# EAGLE board electron_v020 (EAGLE 6.4)
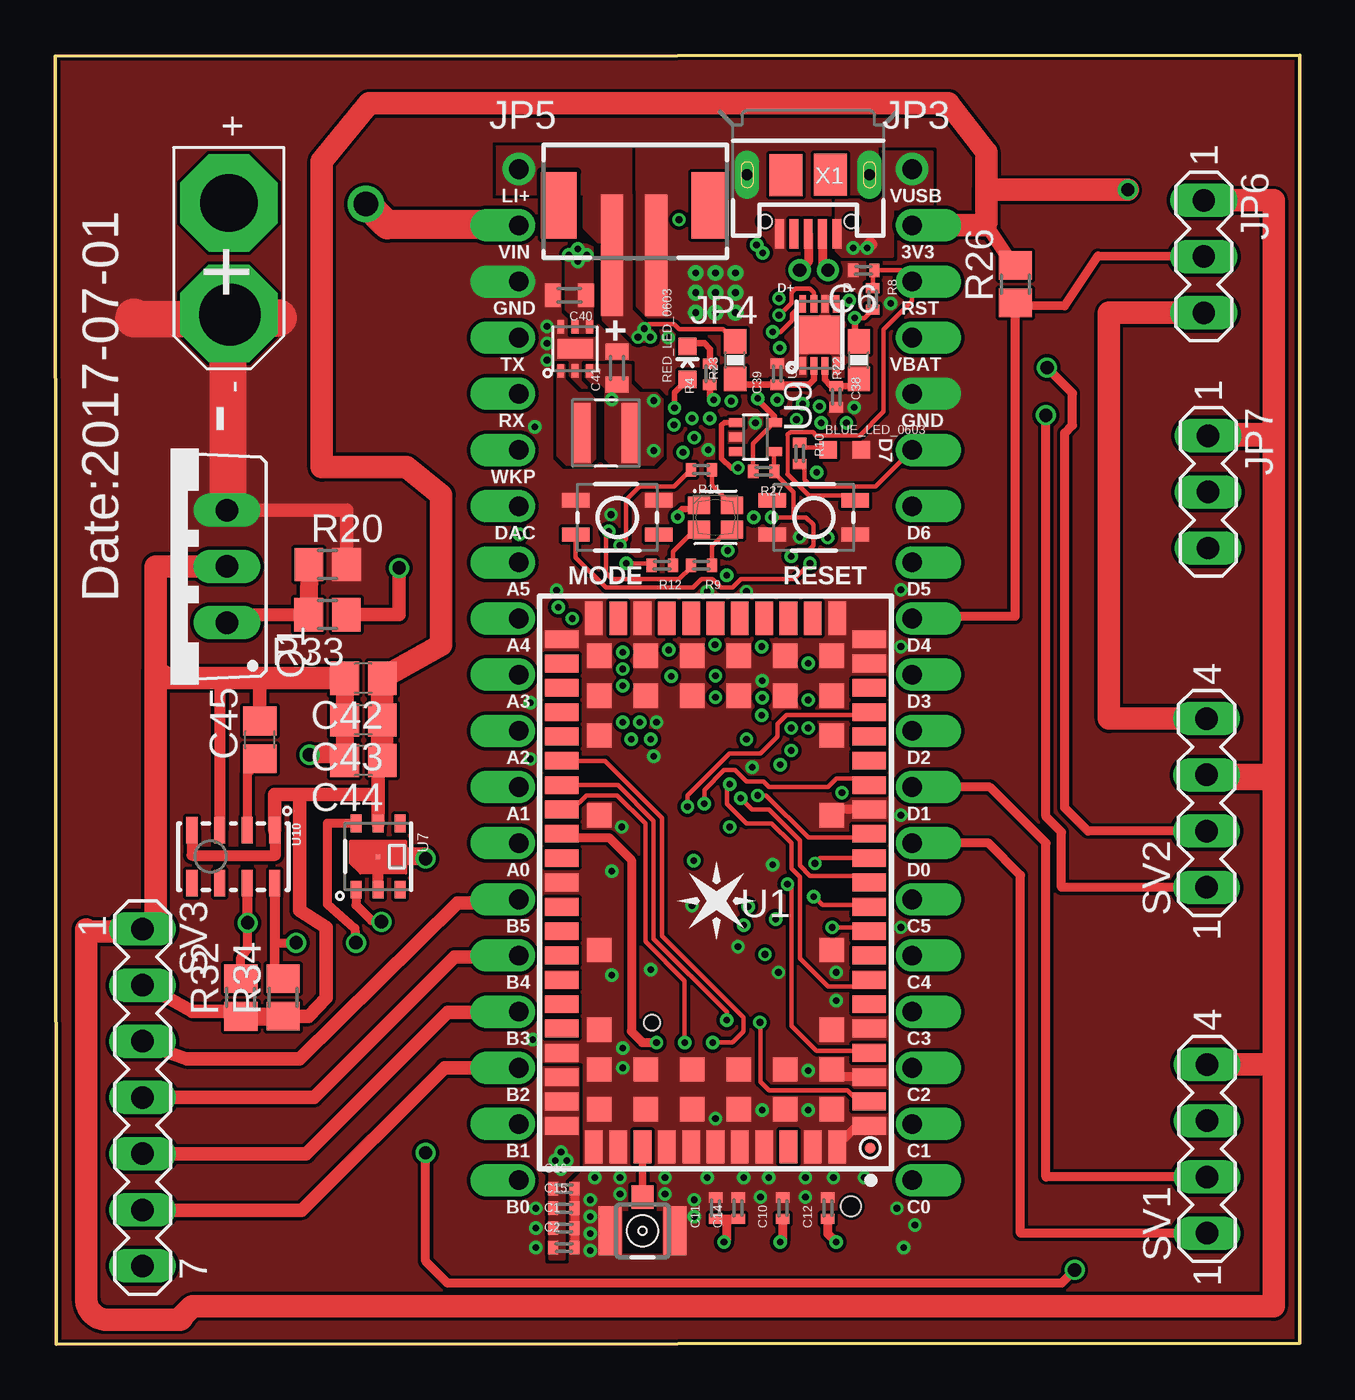
[diagram p0: board, top side]
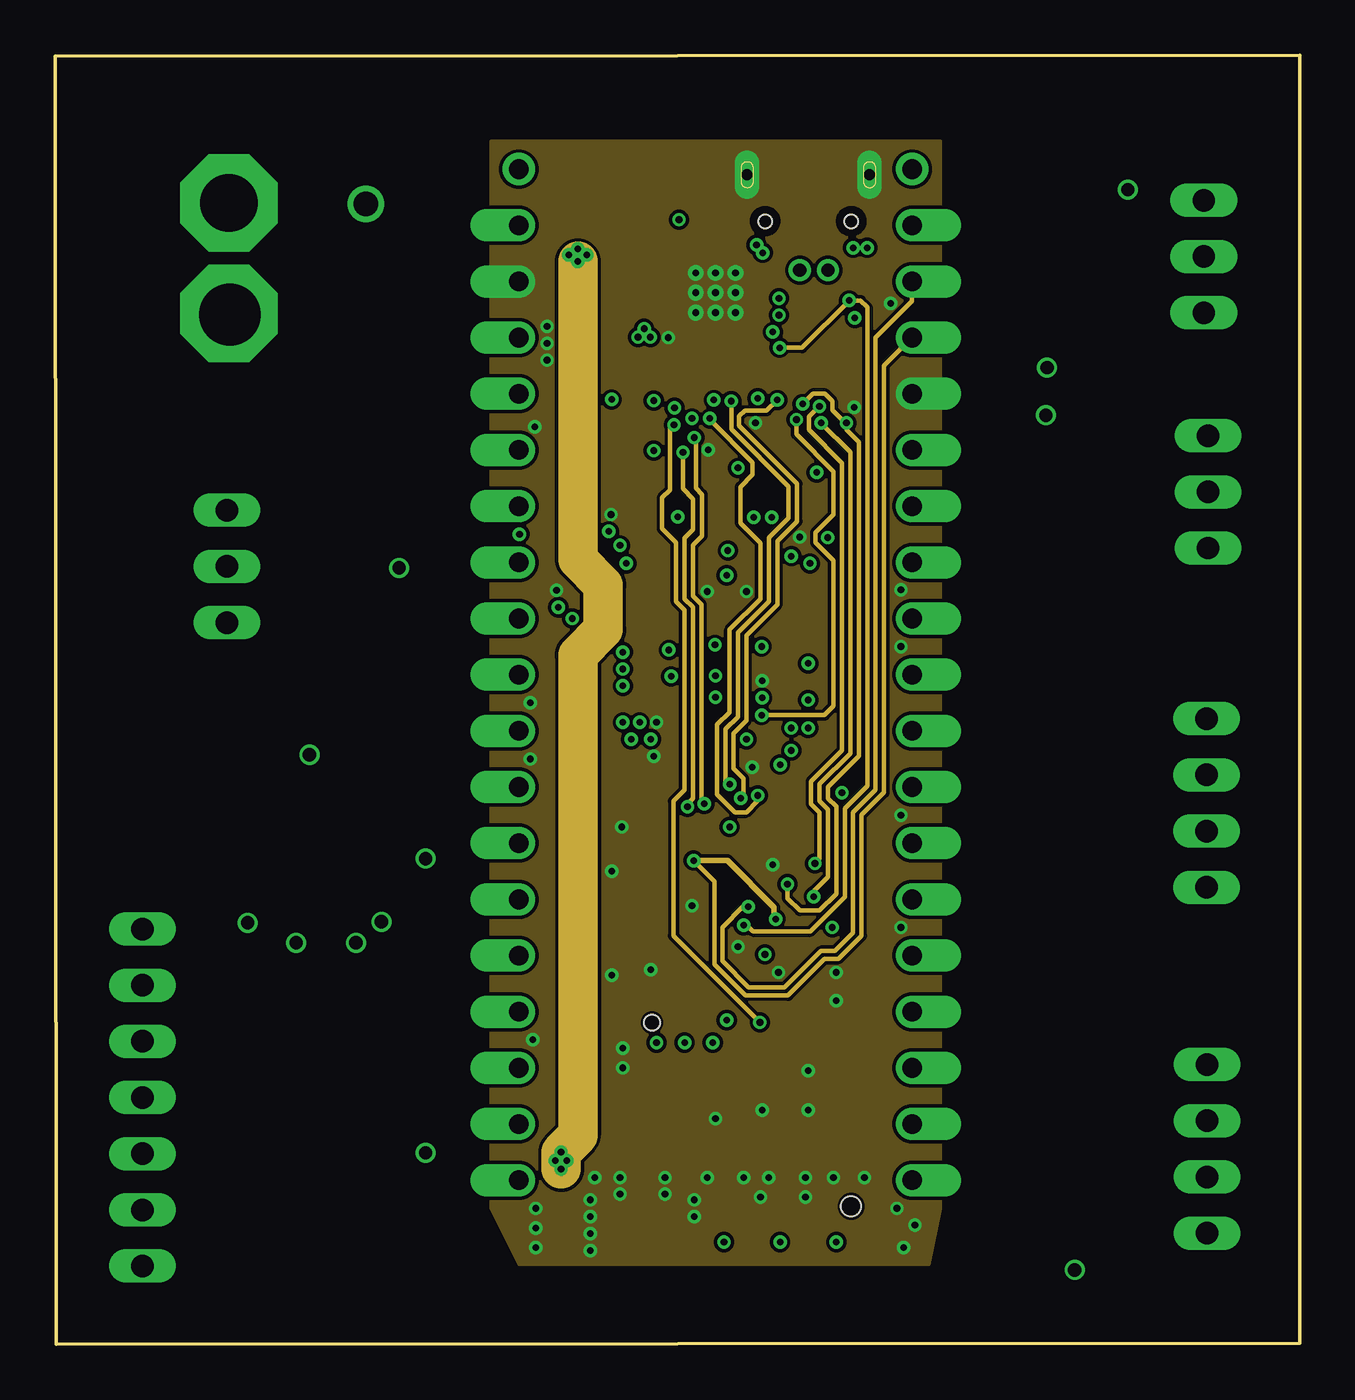
[diagram p1: board, inner layer $GND]
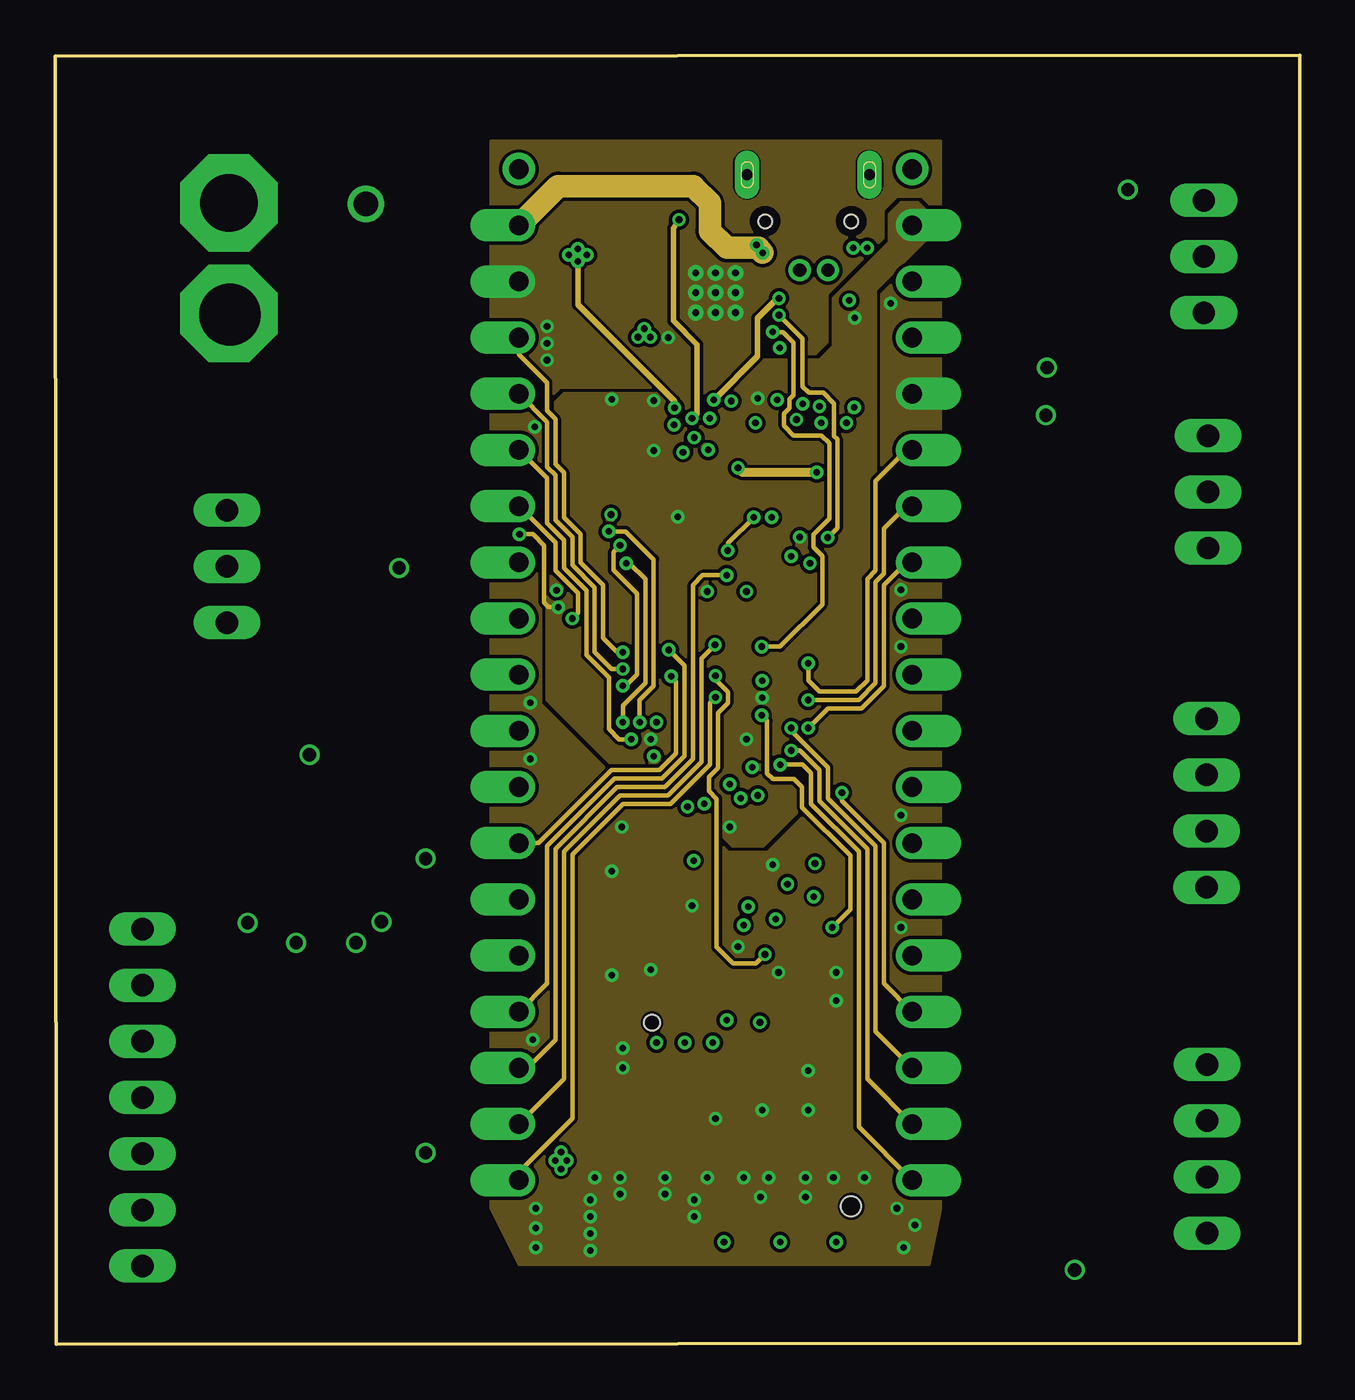
[diagram p2: board, inner layer $+3V3]
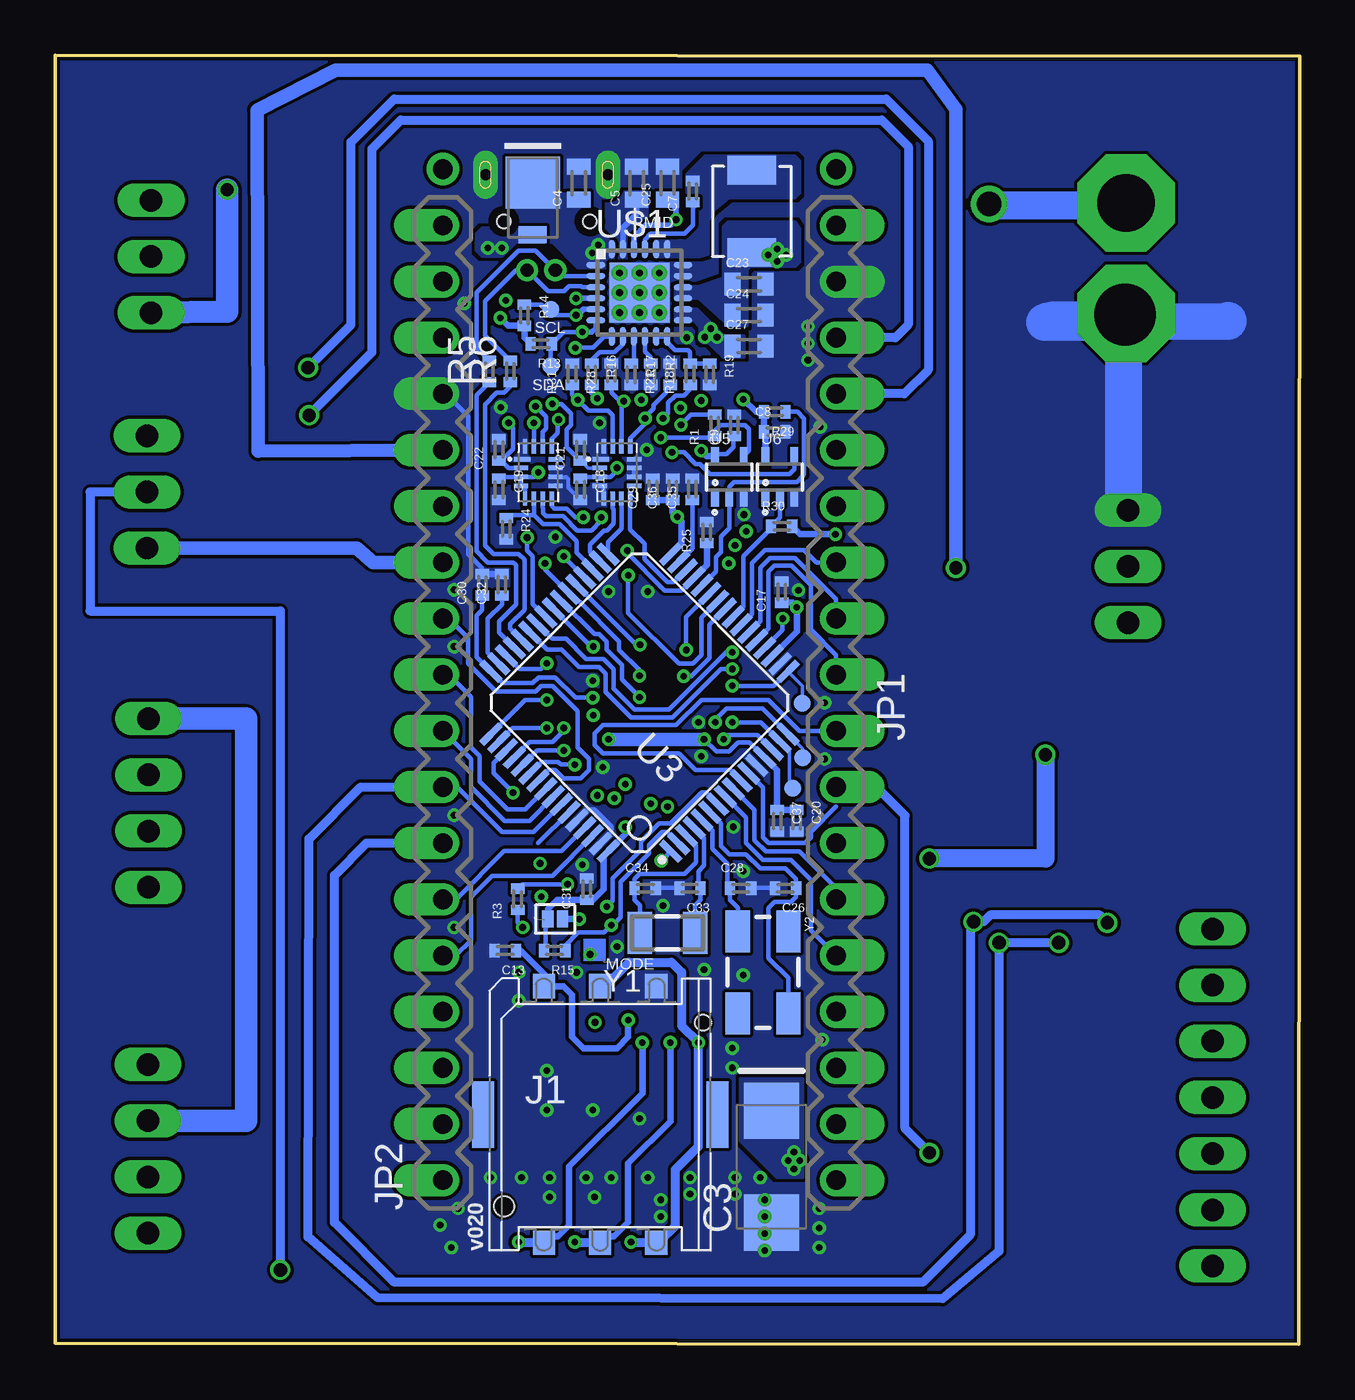
[diagram p3: board, bottom side, seen from below]

Size 56.27 x 58.28 mm. Coordinates in mm from the lower left corner, seen from the top.
Outline: 0,58.23 0.05,0 56.27,0.05 56.27,58.28 0,58.23
Copper layers (1+2*15+16): Top 0.018mm / dielectric 0.195mm / $GND 0.035mm / dielectric 1.1mm / $+3V3 0.035mm / dielectric 0.195mm / Bottom 0.018mm
Design rules "particle-4layer": minimum track width 6mil, minimum drill 0.3mm, track to track 6mil, track to pad 6mil, pad to pad 6mil, via to via 6mil, smd to smd 6mil, copper to edge 6mil, drill to drill 6mil, minimum pad ring 8mil, minimum via ring 6mil, stop-mask expansion 4mil, vias tented up to drill 20mil, thermal gap 8mil
Net classes: 2 RF: width 0.33 mm, clearance 0.191 mm; 3 BAT: clearance 0.203 mm

## Footprints (pad centres in the part's own frame; a part is rotated, then mirrored left to right if it is on the bottom)
LED-0603-NS = smd 0.8 x 0.8: A -0.75,0; C 0.75,0
C0402_B = smd 0.457 x 0.61: 1 -0.483,0; 2 0.483,0
C/6032-28R = smd 2.55 x 2.5: + 2.525,0; - -2.525,0
C0603_B = smd 0.711 x 1.041: 1 -0.749,0; 2 0.749,0
C0805 = smd 1.3 x 1.5: 1 -0.85,0; 2 0.85,0
HSPALM_XT30 = drill 2.6 pad 4.4 octagon: + -2.5,0; - 2.5,0
GCT-SIM8100 = smd 1 x 1.1: C1 2.54,-5.8; C2 0,-5.8; C3 -2.54,-5.8; C5 2.54,5.8; C6 0,5.8; C7 -2.54,5.8 | smd 1 x 3: NC@1 -5.3,0; NC@2 5.3,0 | hole 0.7: 4.65,4.15 | hole 0.9: -4.35,-4.15
IPEX-20279-001E = smd 1 x 1.05: 1 0,1.528 | smd 1.05 x 2.2: 2@1 -1.475,0; 2@2 1.475,0
JUMPER_SMD_NC = smd 0.508 x 0.762: 1 -0.33,0; 2 0.33,0
1X18-D-PADS = drill 0.889 pad 1.473 offset: 1 -21.59,0; 2 -19.05,0; 3 -16.51,0; 4 -13.97,0; 5 -11.43,0; 6 -8.89,0; 7 -6.35,0; 8 -3.81,0; 9 -1.27,0; 10 1.27,0; 11 3.81,0; 12 6.35,0; 13 8.89,0; 14 11.43,0; 15 13.97,0; 16 16.51,0; 17 19.05,0; 18 21.59,0
1X01_NO_SILK = drill 0.889 pad 1.473: 1 0,0
JST-2-SMD-VERT = smd 1 x 5.5: GND 1,-2; VCC -1,-2 | smd 1.6 x 3: P$1 -3.4,0.27; P$2 3.4,0.27
MA03-1 = drill 1.016 long: 1 -2.54,0; 2 0,0; 3 2.54,0
PLCC4-2MM-RGB = smd 1 x 0.8: BLUE -0.75,-0.55; CA 0.75,-0.55; GREEN -0.75,0.55; RED 0.75,0.55
TO220BV = drill 1.016 long: D 0,-2.54; G -2.54,-2.54; S 2.54,-2.54
R0402_B = smd 0.457 x 0.61: 1 -0.483,0; 2 0.483,0
R0805 = smd 1.3 x 1.5: 1 -0.85,0; 2 0.85,0
0603-RES = smd 1.1 x 1: 1 -0.85,0; 2 0.85,0
LED-0603 = smd 0.8 x 0.8: A 0,-0.75; C 0,0.75
TACTILE_SWITCH_SMD = smd 1.25 x 0.65: 1 -1.875,0.775; 2 1.875,0.775; 3 -1.875,-0.775; 4 1.875,-0.775
MA04-1 = drill 1.016 long: 1 -3.81,0; 2 -1.27,0; 3 1.27,0; 4 3.81,0
MA07-1 = drill 1.016 long: 1 -7.62,0; 2 -5.08,0; 3 -2.54,0; 4 0,0; 5 2.54,0; 6 5.08,0; 7 7.62,0
U-BLOX-SARA-U2 = smd 1.5 x 0.8: 1 -6.95,11; 2 -6.95,9.9; 3 -6.95,8.8; 4 -6.95,7.7; 5 -6.95,6.6; 6 -6.95,5.5; 7 -6.95,4.4; 8 -6.95,3.3; 9 -6.95,2.2; 10 -6.95,1.1; 11 -6.95,0; 12 -6.95,-1.1; 13 -6.95,-2.2; 14 -6.95,-3.3; 15 -6.95,-4.4; 16 -6.95,-5.5; 17 -6.95,-6.6; 18 -6.95,-7.7; 19 -6.95,-8.8; 20 -6.95,-9.9; 21 -6.95,-11; 33 6.95,-11; 34 6.95,-9.9; 35 6.95,-8.8; 36 6.95,-7.7; 37 6.95,-6.6; 38 6.95,-5.5; 39 6.95,-4.4; 40 6.95,-3.3; 41 6.95,-2.2; 42 6.95,-1.1; 43 6.95,0; 44 6.95,1.1; 45 6.95,2.2; 46 6.95,3.3; 47 6.95,4.4; 48 6.95,5.5; 49 6.95,6.6; 50 6.95,7.7; 51 6.95,8.8; 52 6.95,9.9; 53 6.95,11 | smd 0.8 x 1.5: 22 -5.5,-11.95; 23 -4.4,-11.95; 24 -3.3,-11.95; 25 -2.2,-11.95; 26 -1.1,-11.95; 27 0,-11.95; 28 1.1,-11.95; 29 2.2,-11.95; 30 3.3,-11.95; 31 4.4,-11.95; 32 5.5,-11.95; 54 5.5,11.95; 55 4.4,11.95; 56 3.3,11.95; 57 2.2,11.95; 58 1.1,11.95; 59 0,11.95; 60 -1.1,11.95; 61 -2.2,11.95; 62 -3.3,11.95; 63 -4.4,11.95; 64 -5.5,11.95 | smd 1.1 x 1.1: 65 -5.25,10.25; 66 -3.15,10.25; 67 -1.05,10.25; 68 1.05,10.25; 69 3.15,10.25; 70 5.25,10.25; 71 -5.25,8.45; 72 -3.15,8.45; 73 -1.05,8.45; 74 1.05,8.45; 75 3.15,8.45; 76 5.25,8.45; 77 -5.25,6.65; 78 5.25,6.65; 79 -5.25,3.05; 80 5.25,3.05; 81 -5.25,-3.05; 82 5.25,-3.05; 83 -5.25,-6.65; 84 5.25,-6.65; 85 -5.25,-8.45; 86 -3.15,-8.45; 87 -1.05,-8.45; 88 1.05,-8.45; 89 3.15,-8.45; 90 5.25,-8.45; 91 -5.25,-10.25; 92 -3.15,-10.25; 93 -1.05,-10.25; 94 1.05,-10.25; 95 3.15,-10.25; 96 5.25,-10.25 | smd 0.5 x 0.5: FID_PIN1 -7,12
UFQFN-16 = smd 0.2 x 0.75: 1 -0.6,-0.73 | smd 0.2 x 0.65: 2 -0.2,-0.78; 3 0.2,-0.78; 4 0.6,-0.78; 9 0.6,0.78; 10 0.2,0.78; 11 -0.2,0.78; 12 -0.6,0.78 | smd 0.65 x 0.2: 5 1.18,-0.6; 6 1.18,-0.2; 7 1.18,0.2; 8 1.18,0.6; 13 -1.18,0.6; 14 -1.18,0.2; 15 -1.18,-0.2; 16 -1.18,-0.6
LQFP64 = smd 1.2 x 0.3: 1 -5.75,3.75; 2 -5.75,3.25; 3 -5.75,2.75; 4 -5.75,2.25; 5 -5.75,1.75; 6 -5.75,1.25; 7 -5.75,0.75; 8 -5.75,0.25; 9 -5.75,-0.25; 10 -5.75,-0.75; 11 -5.75,-1.25; 12 -5.75,-1.75; 13 -5.75,-2.25; 14 -5.75,-2.75; 15 -5.75,-3.25; 16 -5.75,-3.75; 33 5.75,-3.75; 34 5.75,-3.25; 35 5.75,-2.75; 36 5.75,-2.25; 37 5.75,-1.75; 38 5.75,-1.25; 39 5.75,-0.75; 40 5.75,-0.25; 41 5.75,0.25; 42 5.75,0.75; 43 5.75,1.25; 44 5.75,1.75; 45 5.75,2.25; 46 5.75,2.75; 47 5.75,3.25; 48 5.75,3.75 | smd 0.3 x 1.2: 17 -3.75,-5.75; 18 -3.25,-5.75; 19 -2.75,-5.75; 20 -2.25,-5.75; 21 -1.75,-5.75; 22 -1.25,-5.75; 23 -0.75,-5.75; 24 -0.25,-5.75; 25 0.25,-5.75; 26 0.75,-5.75; 27 1.25,-5.75; 28 1.75,-5.75; 29 2.25,-5.75; 30 2.75,-5.75; 31 3.25,-5.75; 32 3.75,-5.75; 49 3.75,5.75; 50 3.25,5.75; 51 2.75,5.75; 52 2.25,5.75; 53 1.75,5.75; 54 1.25,5.75; 55 0.75,5.75; 56 0.25,5.75; 57 -0.25,5.75; 58 -0.75,5.75; 59 -1.25,5.75; 60 -1.75,5.75; 61 -2.25,5.75; 62 -2.75,5.75; 63 -3.25,5.75; 64 -3.75,5.75
TDFN-8 = smd 0.8 x 0.3: 1 -1.4,0.75; 2 -1.4,0.25; 3 -1.4,-0.25; 4 -1.4,-0.75; 5 1.4,-0.75; 6 1.4,-0.25; 7 1.4,0.25; 8 1.4,0.75 | smd 1.73 x 1.88: EP 0,0
SC-70-5 = smd 0.35 x 0.8: 1 -0.65,-0.95; 2 0,-0.95; 3 0.65,-0.95; 4 0.65,0.95; 5 -0.65,0.95
SPARKFUN-SENSORS_HTU21D = smd 0.2 x 0.2: 7 0,0 | smd 0.8 x 0.5: DATA 1.5,-1; GND 1.5,0; NC@1 -1.5,1; NC@6 1.5,1; SCK -1.5,-1; VDD -1.5,0
SC70-5 = smd 0.4 x 0.7: 1 -0.65,-0.85; 2 0,-0.85; 3 0.65,-0.85; 4 0.65,0.85; 5 -0.65,0.85
SPARKFUN-SENSORS_LGA8 = smd 1.2 x 0.5: 1 -1.2,1.875; 2 -1.2,0.625; 3 -1.2,-0.625; 4 -1.2,-1.875; 5 1.2,-1.875; 6 1.2,-0.625; 7 1.2,0.625; 8 1.2,1.875
QFN24 = smd 0.85 x 0.28: 1 -1.975,1.25; 2 -1.975,0.75; 3 -1.975,0.25; 4 -1.975,-0.25; 5 -1.975,-0.75; 6 -1.975,-1.25; 13 1.975,-1.25; 14 1.975,-0.75; 15 1.975,-0.25; 16 1.975,0.25; 17 1.975,0.75; 18 1.975,1.25 | smd 0.28 x 0.85: 7 -1.25,-1.975; 8 -0.75,-1.975; 9 -0.25,-1.975; 10 0.25,-1.975; 11 0.75,-1.975; 12 1.25,-1.975; 19 1.25,1.975; 20 0.75,1.975; 21 0.25,1.975; 22 -0.25,1.975; 23 -0.75,1.975; 24 -1.25,1.975 | smd 2.7 x 2.7: PAD 0,0 | drill 0.3 pad 0.406: PAD@1 -0.9,0.9; PAD@2 0,0.9; PAD@3 0.9,0.9; PAD@4 -0.9,0; PAD@5 0,0; PAD@6 0.9,0; PAD@7 -0.9,-0.9; PAD@8 0,-0.9; PAD@9 0.9,-0.9
DIODE-DO-220AA_NT(SMP) = smd 0.762 x 1.27: ANODE 2.349,0 | smd 2.337 x 2.464: CATHODE 0,0
4020TYPE_NT = smd 1.295 x 2.184: P$1 -1.854,0; P$2 1.854,0
S-PWSON-N6 = smd 0.3 x 0.6: P$1 -0.65,-1; P$2 0,-1; P$3 0.65,-1; P$4 0.65,1; P$5 0,1; P$6 -0.65,1 | smd 1.6 x 0.9: TP 0,0
INDUCTOR-NR3015 = smd 0.8 x 2.7: 1 -1.1,0; 2 1.1,0
M02_0.05_HEADER = drill 0.6 pad 1: P$1 -0.635,0; P$2 0.635,0
TP30_BOT = smd 0.762 x 0.762 bottom: P$1 0,0
USB-MICROB-SLOT-HOLE = smd 0.4 x 1.35: D+ 0,2.675; D- -0.65,2.675; GND 1.3,2.675; ID 0.65,2.675; VBUS -1.3,2.675 | drill 0.5 pad 1.1 long: MT1 -2.775,0; MT2 2.775,0 | smd 1.5 x 1.9: P$1 -1,0; P$2 1,0.01 | hole 0.6: -1.95,2.1; 1.95,2.1
FC135 = smd 1.1 x 1.9: X1 -1.25,0; X2 1.25,0
CRYSTAL-SMD-5X3 = smd 1.9 x 1.1: 1 -1.85,-1.15; 2 1.85,-1.15; 3 1.85,1.15; 4 -1.85,1.15

## Placement (x,y rotation side)
BLUE_LED_0603  [LED-0603-NS]  35.7,40.44 0 top
C1  10nF  [C0402_B]  23,5.26 0 top
C2  0.1uF  [C0402_B]  23,4.37 0 top
C3  220uF  [C/6032-28R]  23.89,8.03 90 bottom
C4  1uF  [C0603_B]  32.6,52.5 90 bottom
C5  20uF  [C0603_B]  29.98,52.5 90 bottom
C6  0.1uF  [C0402_B]  36.56,48.56 180 top
C7  47nF  [C0402_B]  27.44,52.12 90 bottom
C8  0.1uF  [C0402_B]  23.73,41.25 0 bottom
C9  0.1uF  [C0402_B]  25.56,41.55 90 bottom
C10  47pF  [C0402_B]  32.9,6.15 90 top
C11  47pF  [C0402_B]  29.86,6.15 90 top
C12  47pF  [C0402_B]  34.94,6.15 90 top
C13  47pF  [C0402_B]  35.93,17.8 180 bottom
C14  0.1uF  [C0402_B]  30.87,6.15 90 top
C15  68pF  [C0402_B]  23,6.15 0 top
C16  15pF  [C0402_B]  23,7.04 0 top
C17  0.1uF  [C0402_B]  23.43,34.01 90 bottom
C18  0.1uF  [C0402_B]  32.52,38.66 270 bottom
C19  0.1uF  [C0402_B]  36.21,38.66 270 bottom
C20  0.1uF  [C0402_B]  22.74,23.67 270 bottom
C21  0.1uF  [C0402_B]  32.52,40.44 90 bottom
C22  0.1uF  [C0402_B]  36.21,40.44 90 bottom
C23  10uF  [C0603_B]  24.9,47.93 0 bottom
C24  10uF  [C0603_B]  24.9,46.53 0 bottom
C25  4.7uF  [C0603_B]  28.59,52.5 90 bottom
C26  20pF  [C0402_B]  23.25,20.62 180 bottom
C27  10uF  [C0603_B]  24.9,45.14 0 bottom
C28  20pF  [C0402_B]  25.28,20.62 0 bottom
C29  0.1uF  [C0402_B]  29.25,38.66 90 bottom
C30  0.1uF  [C0402_B]  36.97,34.34 90 bottom
C31  0.1uF  [C0402_B]  32.24,20.57 90 bottom
C32  2.2uF  [C0402_B]  36.08,34.34 90 bottom
C33  12pF  [C0402_B]  27.57,20.62 180 bottom
C34  12pF  [C0402_B]  29.6,20.62 0 bottom
C35  2.2uF  [C0402_B]  27.47,38.66 90 bottom
C36  4.7uF  [C0402_B]  28.36,38.66 90 bottom
C37  1uF  [C0402_B]  23.63,23.67 270 bottom
C38  10nF  [C0402_B]  35.32,42.85 270 top
C39  1uF  [C0402_B]  32.65,43.87 90 top
C40  10uF  [C0603_B]  23.25,47.43 180 top
C41  10uF  [C0603_B]  25.41,44.14 90 top
C42  10uF  [C0805]  13.94,30.11 180 top
C43  10uF  [C0805]  13.94,28.23 180 top
C44  10uF  [C0805]  13.94,26.4 180 top
C45  10uF  [C0805]  9.25,27.33 90 top
E$1  [HSPALM_XT30]  7.85,49.11 270 top
J1  SIM-NANO-4FF  [GCT-SIM8100]  31.63,10.39 0 bottom
J2  IPEX-20279-001E  [IPEX-20279-001E]  26.55,5.13 0 top
J3  JUMPER_NC_SMD  [JUMPER_SMD_NC]  33.67,19.23 0 bottom
JP1  M18DPAD  [1X18-D-PADS]  20.97,29.01 270 bottom
JP2  M18DPAD  [1X18-D-PADS]  38.75,29.01 90 bottom
JP3  [1X01_NO_SILK]  38.75,53.14 0 top
JP4  [JST-2-SMD-VERT]  26.17,51.23 0 top
JP5  [1X01_NO_SILK]  20.97,53.14 0 top
JP6  [MA03-1]  51.94,49.18 270 top
JP7  [MA03-1]  52.13,38.54 270 top
LED2  RGB-LED-CLMVB-FKARGB  [PLCC4-2MM-RGB]  29.86,37.39 180 top
Q1  IRF512  [TO220BV]  5.22,35.17 90 top
R1  100k  [R0402_B]  26.45,41.55 90 bottom
R2  333R  [R0402_B]  29.35,43.87 270 bottom
R3  10K  [R0402_B]  35.37,20.12 90 bottom
R4  2.2K  [R0402_B]  29.6,43.87 90 top
R5  22  [R0402_B]  36.64,43.99 90 bottom
R6  22  [R0402_B]  35.7,43.99 90 bottom
R8  10K  [R0402_B]  36.97,47.27 270 top
R9  1K  [R0402_B]  29.22,35.23 180 top
R10  1K  [R0402_B]  33.67,40.28 270 top
R11  1K  [R0402_B]  29.22,39.55 180 top
R12  1K  [R0402_B]  27.44,35.23 180 top
R13  4K7  [R0402_B]  34.3,45.24 180 bottom
R14  4K7  [R0402_B]  35.06,46.53 270 bottom
R15  10K  [R0402_B]  33.69,17.8 180 bottom
R16  10K  [R0402_B]  32.02,43.87 270 bottom
R17  10K  [R0402_B]  30.24,43.87 270 bottom
R18  5.52K  [R0402_B]  27.57,43.87 90 bottom
R19  10K  [R0402_B]  26.68,43.87 270 bottom
R20  10K  [R0805]  12.32,35.26 0 top
R21  10K  [R0402_B]  28.46,43.87 90 bottom
R22  150  [0603-RES]  36.33,44.5 90 top
R23  1K  [0603-RES]  30.75,44.5 90 top
R24  10K  [R0402_B]  35.88,36.88 270 bottom
R25  10K  [R0402_B]  26.81,36.7 90 bottom
R26  4.7K  [R0805]  43.42,47.94 90 top
R27  10K  [R0402_B]  32.04,39.47 180 top
R28  10K  [R0402_B]  31.13,43.87 90 bottom
R29  10K  [R0402_B]  23.73,42.16 180 bottom
R30  10K  [R0402_B]  23.43,36.98 0 bottom
R31  10K  [R0402_B]  32.9,43.87 90 bottom
R32  10K  [R0805]  8.39,15.68 90 top
R33  100  [R0805]  12.31,32.99 180 top
R34  10K  [R0805]  10.3,15.68 90 top
RED_LED_0603  [LED-0603]  28.59,44.37 0 top
RESET  KMR211GLFS  [TACTILE_SWITCH_SMD]  34.3,37.39 0 top
SETUP  KMR211GLFS  [TACTILE_SWITCH_SMD]  25.41,37.39 0 top
SV1  [MA04-1]  52.08,8.84 90 top
SV2  [MA04-1]  52.06,24.47 90 top
SV3  [MA07-1]  3.95,11.16 270 top
U1  U-BLOX-SARA-U260  [U-BLOX-SARA-U2]  29.86,20.88 180 top
U2  SN74AVC4T245  [UFQFN-16]  34.43,39.42 270 bottom
U3  STM32F205RG  [LQFP64]  29.86,29.01 135 bottom
U4  MAX1704X  [TDFN-8]  34.55,45.64 90 top
U5  SN74LVC1G07  [SC-70-5]  25.79,39.22 0 bottom
U6  SN74LVC1G07  [SC-70-5]  23.51,39.22 0 bottom
U7  SPARKFUN-SENSORS_HTU21DSMD  [SPARKFUN-SENSORS_HTU21D]  14.6,22.05 270 top
U8  SN74AVC4T245  [UFQFN-16]  30.87,39.42 270 bottom
U9  TPS22942DCKRSMALL  [SC70-5]  31.66,41.02 270 top
U10  SPARKFUN-SENSORS_MPL3115A2LGA8  [SPARKFUN-SENSORS_LGA8]  8.05,22.05 270 top
U$1  BQ24298 / BQ24195L  [QFN24]  29.86,47.55 0 bottom
U$2  SPARK_LOGO2  [SPARK_LOGO2]  36.03,3.86 0 top
U$3  DIODE_NT  [DIODE-DO-220AA_NT(SMP)]  34.68,52.53 270 bottom
U$4  2.2uH  [4020TYPE_NT]  24.78,51.23 270 bottom
U$5  TPS62291DRV  [S-PWSON-N6]  23.51,45.01 0 top
U$6  2.2uH - NR3015T2R2M  [INDUCTOR-NR3015]  24.9,41.2 0 top
U$7  M02_0.05_HEADER  [M02_0.05_HEADER]  34.3,48.56 0 top
U$8  TP0  [TP30_BOT]  33.87,44.25 0 top
U$9  TP0  [TP30_BOT]  33.87,46.79 0 top
U$11  TP0  [TP30_BOT]  22.92,25.15 0 top
U$12  TP0  [TP30_BOT]  22.46,26.52 0 top
U$13  TP0  [TP30_BOT]  22.49,28.98 0 top
X1  USB-MICROB  [USB-MICROB-SLOT-HOLE]  34.05,52.88 180 top
Y1  32Khz  [FC135]  28.59,18.59 0 bottom
Y2  26Mhz  [CRYSTAL-SMD-5X3]  24.27,16.81 270 bottom

## Library data of the parts
BLUE_LED_0603 RED_LED_0603 = SparkFun
C1 C2 C6-C22 C26 C28-C39 J2 LED2 R1-R6 R8-R19 R21 R24 R25 R27-R31 RESET SETUP U$2 U$8 U$9 U$11-U$13 X1 Y1 = Spark
C3-C5 C23-C25 C27 C40 C41 J1 U1-U3 U5 U6 U8 = Bretts-Spark-Library
C42-C45 R20 R26 R32-R34 = resistor
E$1 = FPV NO_PCB
J3 JP1-JP3 JP5 U$3-U$7 = Particle
JP4 = SparkFun-Connectors
JP6 JP7 SV1-SV3 = con-lstb; OC_FARNELL: unknown; OC_NEWARK: unknown
Q1 = transistor-power
R22 R23 = SparkFun-Passives
U4 = SparkFun-PowerIC
U7 U10 = SF_sch_Photon_Weather_Shield_v10
U9 = Texas Instruments_By_element14_Batch_1
U$1 = electron
Y2 = SparkFun-FreqCtrl

## Nets
!BATT_INT_PC13: R15.1 U3.2 U4.5 U$1.7
!CE: R17.1 U$1.9
!RST: C6.1 JP2.17 R8.1 RESET.2 U3.7
!SETUP: SETUP.3 U3.38
+3V3: C8.1 C9.1 C17.1 C20.1 C29.1 C30.1 C31.1 C36.1 C37.1 C41.1 C42.1 C43.1 C44.1 J3.1 JP2.18 JP6.3 LED2.CA R8.2 R13.2 R14.2 R15.2 R16.2 R22.2 R27.2 R29.2 R30.2 R32.1 R34.1 SV1.3 SV2.4 U3.13 U3.19 U3.32 U3.48 U3.64 U5.5 U6.5 U7.VDD U9.5 U10.1 U10.4 U$5.P$3 U$6.2
+3V8: C1.1 C2.1 C3.+ C15.1 C16.1 C23.1 C24.1 C40.1 RED_LED_0603.A U1.51 U1.52 U1.53 U$1.15 U$1.16 U$4.P$2 U$5.P$4 U$5.P$5
A0: JP1.12 U3.25
A1: U3.11
A2: JP1.10 U3.10
A3: JP1.9 U3.21
A4: JP1.8 U3.22
A5: JP1.7 U3.23
ANT [RF]: J2.1 U1.56
ANT_DET: U1.62
B0: JP1.18 U3.39
B1: JP1.17 U3.37
B2: JP1.16 U3.26
B3: JP1.15 U3.27
B4: JP1.14 U3.8
B5: JP1.13 U3.9
BAT [BAT]: C27.1 JP4.VCC JP5.1 R23.2 U$1.13 U$1.14
BTST: C7.1 U$1.21
C0: JP2.1 U3.54
C1: JP2.2 U3.53
C2: JP2.3 U3.52
C3: JP2.4 U3.51
C4: JP2.5 U3.62
C5: JP2.6 U3.61
CTS_UB: R31.1 U1.11 U8.15
CTS_UC: U3.34 U8.6
D0: U3.59
D1: U3.58
D2: JP2.9 U3.57
D3: JP2.10 U3.56
D4: U3.55
D5: U3.50
D6: JP2.13 U3.49
D7: JP2.14 R10.2 R33.1 U3.46
DAC: JP1.6 U3.20
DTR_UB: R3.1 U1.9 U2.13
DTR_UC: R27.1 U2.8 U3.36 U9.4
GND: BLUE_LED_0603.C C1.2 C2.2 C3.- C4.2 C5.2 C6.2 C8.2 C9.2 C10.2 C11.2 C12.2 C13.2 C14.2 C15.2 C16.2 C17.2 C18.2 C19.2 C20.2 C21.2 C22.2 C23.2 C24.2 C25.2 C26.2 C27.2 C28.2 C29.2 C30.2 C31.2 C32.2 C33.2 C34.2 C35.2 C36.2 C37.2 C38.2 C39.2 C40.2 C41.2 J1.C5 J2.2@1 J2.2@2 JP1.2 JP2.15 JP4.GND Q1.S R2.2 R17.2 R19.2 R20.2 R21.2 R24.2 R25.2 R28.2 R31.2 RESET.3 RESET.4 SETUP.1 SETUP.2 U1.1 U1.3 U1.5 U1.14 U1.20 U1.21 U1.22 U1.30 U1.32 U1.33 U1.43 U1.50 U1.54 U1.55 U1.57 U1.58 U1.59 U1.60 U1.61 U1.63 U1.64 U1.65 U1.66 U1.67 U1.68 U1.69 U1.70 U1.71 U1.72 U1.73 U1.74 U1.75 U1.76 U1.77 U1.78 U1.79 U1.80 U1.81 U1.82 U1.83 U1.84 U1.85 U1.86 U1.87 U1.88 U1.89 U1.90 U1.91 U1.92 U1.93 U1.94 U1.95 U1.96 U2.1 U2.9 U2.10 U2.11 U2.16 U3.12 U3.18 U3.60 U3.63 U4.1 U4.4 U4.6 U4.EP U5.3 U6.3 U8.1 U8.4 U8.5 U8.10 U8.11 U8.12 U8.16 U9.2 U$1.17 U$1.18 U$1.PAD U$1.PAD@1 U$1.PAD@2 U$1.PAD@3 U$1.PAD@4 U$1.PAD@5 U$1.PAD@6 U$1.PAD@7 U$1.PAD@8 U$1.PAD@9 U$5.P$2 U$5.P$6 U$5.TP X1.GND X1.MT1 X1.MT2
ILIM: R2.1 U$1.10
INT_PRESSURE: U10.6
LED1: BLUE_LED_0603.A R10.1
N$6: R4.2 RED_LED_0603.C
N$7: R16.1 U$1.8
N$9: C45.1 U10.2
N$11: C39.1 R23.1 U4.2
N$12: C38.1 R22.1 U4.3
N$15: C35.1 U3.31
N$16: C32.1 U3.47
N$27: LED2.BLUE R11.1
N$29: LED2.GREEN R9.1
N$46: Q1.G R20.1 R33.2
N$54: LED2.RED R12.1
OSC32_IN_UC: C34.1 U3.3 Y1.X1
OSC32_OUT_UC: C33.1 U3.4 Y1.X2
OSC_IN_UC: C28.1 U3.5 Y2.1
OSC_OUT_UC: C26.1 U3.6 Y2.3
P_3V3: C18.1 C19.1 U2.3 U2.4 U2.5 U8.3 U9.1
PA8_PM_SCL: R14.1 U3.41 U4.7 U$1.5 U$9.P$1
PC9_PM_SDA: R13.1 U3.40 U4.8 U$1.6 U$8.P$1
PMID: C5.1 U$1.23
PWR_UB: R1.1 U1.15 U5.4
PWR_UC: R29.1 U3.28 U5.2
QGND: C42.2 C43.2 C44.2 JP6.1 JP7.1 Q1.D SV1.4 SV2.3 U7.7 U7.GND U10.3
REGN: C25.1 R18.1 U$1.22
RESET_UB: U1.18 U6.4
RESET_UC: R30.1 U3.24 U6.2
RGB_BLUE: R11.2 U3.17 U$13.P$1
RGB_GREEN: R9.2 U3.16 U$12.P$1
RGB_RED: R12.2 U3.15 U$11.P$1
RI_UB: R28.1 U1.7 U8.14
RI_UC: U3.33 U8.7
RTS_UB: U1.10 U2.15
RTS_UC: R24.1 U2.6 U3.35
RX: JP1.4 SV2.2 U3.43
RXD_UB: R21.1 U1.13 U8.13
RXD_UC: U3.30 U8.8
SCL: JP2.8 R34.2 SV1.2 U7.SCK U10.8
SDA: JP2.7 R32.2 SV1.1 U10.7
SIM_CLK: C12.1 J1.C3 U1.38
SIM_DET: U1.42
SIM_IO: C13.1 J1.C7 U1.39
SIM_RST: C10.1 J1.C2 U1.40
SIM_VCC: C11.1 C14.1 J1.C1 J1.C6 U1.41
SOIL_MOIST: JP1.11 JP7.2
SOIL_MOIST_POWER: JP2.12 JP7.3
SOIL_TEMP: JP2.11 JP6.2
STAT: R4.1 U$1.4
SW1: C7.2 U$1.19 U$1.20 U$4.P$1
SW2: U$5.P$1 U$6.1
TS: R18.2 R19.1 U$1.11 U$1.12
TX: JP1.3 SV2.1 U3.42
TXD_UB: U1.12 U2.14
TXD_UC: R25.1 U2.7 U3.29
USB_DM: R6.2 U$1.3 U$7.P$2 X1.D-
USB_DM_UC: R6.1 U3.44
USB_DP: R5.2 U$1.2 U$7.P$1 X1.D+
USB_DP_UC: R5.1 U3.45
V_BCKP: R1.2 U1.2
V_INT: C21.1 C22.1 R3.2 U1.4 U2.2 U8.2
VBAT: J3.2 JP2.16 U3.1
VBUS: JP3.1 U$3.ANODE X1.VBUS
VIN [vcc]: C4.1 JP1.1 U$1.1 U$1.24 U$3.CATHODE
WKP: JP1.5 U3.14

## Tracks (layer width: path | path; a pad name or v marks a point on that pad's centre or on a via)
!BATT_INT_PC13  (via drill 0.3)
  Top 0.203: U4.5 35.75,47.04 v35.9,47.19
  $GND 0.203: v31.13,18.95 31.28,18.95 31.56,18.67 34.15,18.67 35.7,20.22 35.7,24.23 36.71,25.25 36.71,46.89 36.41,47.19 v35.9,47.19 33.77,45.06 v32.75,45.06
  Bottom 0.203: U$1.7 31.45,45.57 31.96,45.06 v32.75,45.06 | U3.2 28.61,23.16 28.84,23.16 29.42,22.58 29.42,22.2 30.72,20.9 30.72,19.3 31.08,18.95 v31.13,18.95 31.46,18.62 32.62,18.62 33.21,18.03 R15.1
!CE
  Bottom 0.203: U$1.9 30.11,44.48 R17.1
!RST  (via drill 0.3)
  Top 0.178: 33.11,41.12 33.11,39.34
  Top 0.203: R8.1 36.97,48.49 C6.1 38.24,48.56 JP2.17 38.75,47.17 37.45,45.87 37.45,42.16 36.38,41.1 34.4,41.1 34.25,41.25 33.23,41.25 33.11,41.12 | RESET.2 35.96,38.38 34.07,38.38 33.11,39.34
  $GND 0.203: JP2.17 38.75,47.17 37.09,45.52 37.09,25.07 36.08,24.05 36.08,18.59 35.27,17.78 34.63,17.78 32.98,16.13 31.36,16.13 30.16,17.32 30.16,18.85 31.1,19.79 v31.33,19.79
  Bottom 0.203: U3.7 26.85,24.94 27.06,24.94 28.46,23.55 28.97,23.55 29.78,22.73 29.78,22.35 31.08,21.06 31.08,20.04 v31.33,19.79
!SETUP  (via drill 0.3)
  Top 0.203: SETUP.3 23.54,35.58 24.9,34.21 28.84,34.21 29.22,34.59 29.73,34.59 30.11,34.21 30.62,34.21 31,34.59 33.41,34.59 v34.12,35.3
  $+3V3 0.203: v29.86,30.23 29.86,30.05 30.41,29.49 30.41,29.01 29.96,28.55 29.96,26.06 29.55,25.65 29.55,25.02 29.91,24.66 29.91,17.96 30.64,17.22 31.69,17.22 v32.09,17.63
  Bottom 0.203: v29.86,30.23 29.86,30.48 30.77,31.39 30.77,31.77 32.57,33.58 32.66,33.58 U3.38 34.12,35.04 v34.12,35.3
+3V3  (via drill 0.3, 0.6)
  Top 0.203: v36.16,46.41 36.59,46.41 R8.2 | U9.5 31.56,40.72 R27.2
  Top 0.305: v28.15,37.41 28.15,37.59 28.33,37.77 28.94,37.77 LED2.CA | v36.16,46.41 36.16,45.53 R22.2 | v31.76,42.77 31.76,42.72 32.51,41.97 U9.5
  Top 0.5: U10.4 6.18,22.11 9.95,22.11 9.93,24.86
  Top 0.61: C44.1 14.6,26.21 14.6,24.86 | 14.6,24.86 U7.VDD | 11.05,24.86 9.93,24.86 U10.1 | 11.05,24.86 14.6,24.86 | R32.1 8.34,14.83 | R34.1 11.45,14.83 12.25,15.66 12.25,18.86 11.05,19.61 11.05,24.86
  Top 0.813: 8.34,14.83 R34.1
  Top 1.016: C44.1 C43.1 C42.1 17.45,31.62 17.45,38.41 15.9,39.66 12.05,39.66 12.05,53.51 14.2,56.11 40.4,56.11 42.1,53.91 42.1,52.21 | JP2.18 41.99,50.6 42.1,50.71 42.1,52.21 | 42.1,52.21 v48.5,52.21 | SV2.4 47.65,28.28 47.65,46.64 JP6.3
  $+3V3 0.203: v22.74,33.32 22.31,33.32 22.11,33.53 22.11,36.12 21.6,36.63 v20.99,36.63
  Bottom 0.203: C30.1 36.97,33.2 37.22,32.94 37.22,31.07 U3.48 36.05,29.9 34.68,29.9 34.43,30.15 33.67,30.15 32.75,29.23 v31.96,29.23 | v26.94,27.35 26.38,26.8 25.82,26.8 25.41,27.2 24.87,27.2 U3.13 | U3.64 31.27,22.26 31.43,22.1 | C9.1 25.61,41.07 25.61,40.56 25.92,40.26 26.35,40.26 U5.5 | R15.2 34.1,17.88 34.1,18.82 34,18.92 J3.1
  Bottom 0.254: U3.32 28.44,35.75 | 28.18,37.41 v28.15,37.41 | R16.2 32.02,43.03 v31.76,42.77
  Bottom 0.305: U3.13 23.63,25.97 C37.1 C20.1 | U3.19 22.74,32.23 v22.74,33.32 22.95,33.53 C17.1 | U3.64 30.49,23.07 v30.49,23.39 | 28.44,35.75 27.95,36.25 27.95,37.21 v28.15,37.41 28.36,37.62 C36.1 C29.1 | U6.5 24.16,41.19 C8.1 R29.2 24.6,42.16 v25.16,42.72 | U5.5 26.82,40.17 v27.06,40.41 | v36.16,46.41 35.8,46.05 R14.2 35.06,45.52 R13.2 | 31.43,22.1 31.48,22.05 31.48,20.57 31.96,20.09 C31.1 33.59,20.09 34,19.68 J3.1 | v20.99,36.63 22.59,36.63 R30.2
  Bottom 0.61: v26.94,27.35 v31.25,27.35
  Bottom 1.016: v48.5,52.21 48.5,46.69 JP6.3 | SV1.3 47.65,10.11 47.65,28.28 SV2.4
  other vias: 27.06,42.67
  pour $+3V3 (no thermals): 22.62,42.59 23,42.98 30.11,42.98 31.63,44.5 34.55,44.5 35.19,45.14 35.19,47.29 37.73,49.83 37.73,51.1 38.24,51.61 39,51.61 39.38,51.23 39.38,49.96 37.09,47.68 37.09,39.04 37.09,30.91 34.3,28.12 34.3,24.81 32.02,22.53 30.62,22.53 27.19,25.96 25.41,25.96 22.24,29.13 22.24,34.09 22.62,34.47
  pour Top (rank 2, no thermals): 24.01,44.25 26,44.25 26,43.41 26.43,42.98 27.19,42.98 27.44,42.72 27.44,40.18 27.06,39.8 25.16,39.8 24.9,40.05 24.9,43.23 24.65,43.48 24.27,43.48 24.01,43.74
+3V8  (via drill 0.3)
  Top 0.254: RED_LED_0603.A 28,43.04 v28,42.34
  Top 0.406: RED_LED_0603.A 28.74,43.47
  $GND 1.778: v22.87,7.92 v22.87,8.69 23.63,9.45 23.63,31.16 24.78,32.31 24.78,34.34 23.63,35.48 v23.63,48.97
  $+3V3 0.254: v23.63,48.97 23.63,47.02 28,42.65 v28,42.34
  other vias: 23.63,49.53 23.23,49.25 24.04,49.25 23.12,8.3 22.62,8.3
  pour Bottom (no thermals): 22.49,11.99 25.28,11.99 25.28,9.19 23.63,7.54 22.49,7.54
  pour Top (no thermals): 22.11,12.5 23.63,12.5 23.63,8.05 23,7.42 23,3.86 22.36,3.86 22.36,7.8 22.11,8.05
  pour Bottom (no thermals): 28.23,47.83 28.23,47.29 27.19,47.29 25.82,46.05 25,46.05 25,48.56 24.83,48.74 22.79,48.74 22.62,48.92 22.62,50.42 22.82,50.75 25.84,50.75 26.05,50.55 26.05,48.21 27.19,47.83
  pour Top (no thermals): 24.27,45.77 23.38,45.77 23.38,46.53 23.12,46.79 23.12,49.33 23.51,49.71 24.01,49.71 24.27,49.58
A0  (via drill 0.3)
  $+3V3 0.203: v27.85,30.2 28.08,29.97 28.08,26.72 27.32,25.96 25.16,25.96 21.86,22.66 JP1.12
  Bottom 0.203: U3.25 26.68,32.53 26.68,31.04 27.52,30.2 v27.85,30.2
A1
  Bottom 0.203: U3.11 24.27,25.19 24.27,22.91 24.01,22.66 22.36,22.66 22.11,22.91 22.11,23.16 20.97,24.31
A2
  Bottom 0.203: JP1.10 22.62,27.74 24.01,29.13 27.06,29.13 28.21,27.99 31.51,27.99 31.89,27.61 31.89,27.1 31.51,26.72 28.08,26.72 27.32,25.96 25.75,25.96 U3.10
A3
  Bottom 0.203: U3.21 24.01,32.37 24.01,34.95 23.76,35.2 22.97,35.2 22.11,34.34 22.11,32.31 20.97,31.16 JP1.9
A4
  Bottom 0.203: U3.22 24.4,32.7 24.4,35.13 23.96,35.56 22.82,35.56 20.97,33.7 JP1.8
A5
  Bottom 0.203: U3.23 24.78,33.02 24.78,35.33 24.19,35.91 22.41,35.91 21.86,35.36 JP1.7
ANT
  Top 0.33: U1.56 J2.1
  Top 0.61: J2.1
B0  (via drill 0.3)
  $+3V3 0.203: JP1.18 20.97,7.8 23.38,10.21 23.38,22.15 25.67,24.43 27.82,24.43 29.6,26.21 29.6,29.01 v29.86,29.26
  Bottom 0.203: U3.39 31.89,32.1 31.69,32.1 31.36,31.77 31.36,31.42 30.64,30.71 30.64,30.05 v29.86,29.26
B1  (via drill 0.3)
  $+3V3 0.203: JP1.17 23,11.99 23,22.27 25.54,24.81 27.7,24.81 29.22,26.34 29.22,31.01 v29.83,31.62
  Bottom 0.203: U3.37 30,31.62 v29.83,31.62
B2  (via drill 0.3)
  $+3V3 0.203: JP1.16 21.35,12.5 22.62,13.77 22.62,22.4 25.41,25.2 27.57,25.2 28.84,26.47 28.84,34.34 29.27,34.77 v30.36,34.77
  Bottom 0.203: U3.26 27.06,32.86 27.06,31.16 27.44,30.78 28.08,30.78 30.36,33.07 v30.36,34.77
B3  (via drill 0.3)
  $+3V3 0.203: JP1.15 22.24,16.31 22.24,22.53 25.28,25.58 27.44,25.58 28.46,26.59 28.46,30.68 v27.75,31.39
  Bottom 0.203: U3.27 27.75,32.88 v27.75,31.39
B4
  Bottom 0.203: U3.8 25.03,23.83 25.03,22.66 24.27,21.89 23,21.89 22.11,21.01 22.11,18.72 JP1.14
B5
  Bottom 0.203: JP1.13 20.97,20.62 22.62,22.27 24.14,22.27 24.65,22.78 24.65,24.15 U3.9
BAT  (via drill 0.3)
  Top 0.203: R23.2 30.2,45.9 28.21,45.9 27.98,46.13 26.83,46.13 v26.63,45.92
  other vias: 26.35,45.54 26.91,45.54
  pour Bottom (rank 3, no thermals): 28.23,46.81 28.23,46.3 27.42,46.3 27.11,46 27.11,45.39 27.01,45.29 26.73,45.29 26.07,44.63 25.13,44.63 25.13,45.59 26.05,45.59 27.27,46.81
  pour Top (rank 3, no thermals): 24.78,51.99 26.05,51.99 26.05,46.79 27.11,45.72 27.11,45.62 27.11,45.39 27.04,45.31 26.25,45.31 25.67,45.9 25.16,45.9 24.78,46.28
  pour Top (no thermals): 19.95,51.99 23.89,51.99 23.89,50.47 24.52,49.83 26.05,49.83 26.05,54.15 19.95,54.15
BTST
  Bottom 0.203: C7.1 27.32,51.51 27.44,51.38 27.44,50.6 27.82,50.22 29.35,50.22 29.61,49.96 U$1.21
C0  (via drill 0.3)
  $+3V3 0.203: v32.78,26.21 33.79,26.21 34.17,25.83 34.17,24.43 36.33,22.27 36.33,9.83 JP2.1
  Bottom 0.203: U3.54 34.29,26.34 33.54,26.34 33.41,26.21 v32.78,26.21
C1  (via drill 0.3)
  $+3V3 0.203: v33.29,26.85 33.67,26.85 34.55,25.96 34.55,24.56 36.71,22.4 36.71,11.99 JP2.2
  Bottom 0.203: U3.53 34.49,26.85 v33.29,26.85
C2  (via drill 0.3)
  $+3V3 0.203: v33.29,27.86 33.29,27.74 34.94,26.09 34.94,24.69 37.09,22.53 37.09,14.15 JP2.3
  Bottom 0.203: U3.52 34.82,27.23 33.79,27.23 33.29,27.74 v33.29,27.86
C3  (via drill 0.3)
  $+3V3 0.203: v35.57,24.94 35.57,24.56 37.48,22.66 37.48,16.31 JP2.4
  Bottom 0.203: U3.51 36.46,26.29 36.46,25.83 v35.57,24.94
C4
  Bottom 0.203: 38.11,17.58 38.16,17.58 | 38.16,17.58 JP2.5 | U3.62 33.79,21.18 36.51,21.18 37.48,20.22 37.48,18.26 38.16,17.58
C5
  Bottom 0.203: JP2.6 38.11,20.12 38.11,20.17 35.98,22.3 33.38,22.3 U3.61
CTS_UB  (via drill 0.3)
  Top 0.203: v31,24.69 31.51,24.18 32.27,24.18 33.67,22.78 33.67,21.64 34.12,21.18 36.5,21.18 U1.11
  $GND 0.203: v31,24.69 31.13,24.81 31.13,25.58 30.67,26.03 30.67,27.61 31.25,28.19 31.25,32.05 32.65,33.45 32.65,36.32 33.54,37.21 33.54,38.91 30.92,41.53 30.92,41.96 31.18,42.21 32.17,42.21 v32.65,42.7
  Bottom 0.203: U8.15 31.07,42.01 31.28,42.21 32.17,42.21 v32.65,42.7 32.9,42.95 R31.1 32.9,43.36
CTS_UC
  Bottom 0.203: U8.6 31.07,37.82 31.02,37.77 31.02,37.11 31.33,36.8 31.46,36.8 32.09,36.17 32.09,35.81 31.65,35.37 U3.34
D0
  Bottom 0.203: U3.59 34.44,22.66
D1
  Bottom 0.203: U3.58 34.64,23.16 36.08,23.16 38.11,25.2
D2
  Bottom 0.203: U3.57 34.84,23.67 35.95,23.67 37.48,25.2 37.48,26.47 JP2.9
D3
  Bottom 0.203: U3.56 35.04,24.18 35.83,24.18 37.09,25.45 37.09,26.59 37.48,26.97 37.48,29.26 38.49,30.28 JP2.10
D4
  Bottom 0.203: U3.55 33.97,25.96 33.67,25.96 33.29,25.58 32.52,25.58 32.14,25.96 32.14,26.47 32.65,26.97 32.65,28.62 33.79,29.77 34.3,29.77 34.55,29.51 36.33,29.51 37.6,30.78 37.6,31.93 38.49,32.82
D5  (via drill 0.3)
  $+3V3 0.203: 38.49,35.36 37.48,34.34 37.48,29.77 36.46,28.75 34.94,28.75 v34.05,27.86
  Bottom 0.203: U3.50 35.59,27.86 v34.05,27.86
D6  (via drill 0.3)
  $+3V3 0.203: v34.05,29.13 36.33,29.13 37.09,29.9 37.09,34.47 37.48,34.85 37.48,36.88 38.49,37.9 JP2.13
  Bottom 0.203: U3.49 35.03,29.13 v34.05,29.13
D7  (via drill 0.3, 0.6)
  Top 0.203: JP2.14 37.09,38.79 34.17,38.79 33.87,39.09 33.87,39.67 33.74,39.8 R10.2
  Top 0.61: R33.1 15.55,32.99 v15.55,35.11
  $+3V3 0.203: v34.05,30.78 34.05,30.02 34.55,29.51 36.21,29.51 36.71,30.02 36.71,34.59 37.09,34.98 37.09,39.04 38.49,40.44 JP2.14
  Bottom 0.203: U3.46 35.27,30.53 34.3,30.53 v34.05,30.78
  Bottom 0.61: v15.55,35.11 15.55,55.86 16.85,57.61 43.6,57.61 47.15,55.81 47.1,40.39 JP2.14
DAC  (via drill 0.3)
  $+3V3 0.203: JP1.6 22.62,36.25 22.62,34.98 23.63,33.96 23.63,33.07 v23.38,32.82
  Bottom 0.203: U3.20 23.38,32.3 v23.38,32.82
DTR_UB  (via drill 0.3)
  Top 0.203: U1.9 36.64,18.85 v35.14,18.85
  $GND 0.203: v31.94,28.45 34.78,28.45 35.19,28.85 35.19,35.43 34.38,36.25 34.38,36.7 35.19,37.52 35.19,39.47 33.51,41.15 v33.51,41.81
  $+3V3 0.203: v35.14,18.85 35.95,19.66 35.95,22.1 33.77,24.28 33.77,25.2 33.41,25.55 32.45,25.55 32.19,25.81 32.19,28.19 v31.94,28.45
  Bottom 0.203: U2.13 33.83,40.93 33.56,41.2 33.56,41.76 v33.51,41.81 | R3.1 35.37,19.07 v35.14,18.85
DTR_UC  (via drill 0.3)
  Top 0.203: 33.44,37.39 v32.4,37.39 | v33.29,35.64 33.56,35.91 34.07,35.91 34.28,36.12 34.28,37.06 33.95,37.39 33.44,37.39 | 33.44,37.39 33.39,37.44 33.39,38.53 32.52,39.4 R27.1 32.51,39.48 U9.4
  Bottom 0.203: U3.36 33.29,35.62 v33.29,35.64 | U2.8 33.82,37.9 33.72,37.79 33.16,37.79 32.75,37.39 v32.4,37.39
GND  (via drill 0.3, 2.8)
  Top 0.254: 34.68,27.86 35.02,27.53 U1.83
  Top 0.406: C16.2 C15.2 C1.2 C2.2 | U1.64 35.36,8.98 36.21,9.83 36.76,9.83 U1.1 | U1.3 35.46,12.08 U1.71 | U1.14 35.36,24.18 U1.81
  Top 0.61: R20.2 13.17,37.71 Q1.S
  Top 1.676: 7.95,46.41 7.8,46.41 7.8,37.91 | 10.1,46.41 3.55,46.36 3.55,46.46
  Bottom 0.178: U2.10 33.19,39.22 33.08,39.12 33.08,38.73 C18.2
  Bottom 0.203: C28.2 C26.2 | C34.2 C33.2 | U3.60 32.21,24.18 31.89,24.18 31.13,23.42 31.13,23.16 31.62,22.67 U3.63 | U8.11 U8.10 | C30.2 36.97,35.1 37.6,35.74 37.6,41.96 38.62,42.98 | U8.5 31.47,38.82 U8.4
  Bottom 0.305: C32.2 C30.2
  Bottom 1.676: 7.9,37.91 7.95,37.91 7.95,46.31 | 7.95,46.31 7.95,46.41 7.9,46.41 | 7.95,46.31 11.25,46.31 11.55,46.21 3.25,46.26 3.25,46.31 | 7.9,46.41 v7.9,46.56 | 7.9,46.41 7.8,46.41 7.8,46.31
  other vias: 22.67,34.09 21.47,26.47 28.79,19.84 25.16,16.69 26.94,16.94 30.87,17.98 33.67,36.5 36.13,42.37 29.53,40.44 21.73,6.15 21.73,4.37 24.4,7.54 33.92,7.54 27.57,7.54 29.48,7.54 25.54,7.54 32.27,7.54 31.13,7.54 36.59,7.54 38.06,6.15 38.37,4.37 35.19,7.54 21.6,13.77 25.67,12.5 31.96,10.59 35.32,15.54 34.05,12.37 25.67,13.38 25.16,21.39 25.61,23.39 27.06,26.59 31.96,30 38.24,31.55 38.24,23.93 38.24,18.85 34.05,10.59 29.86,10.21 31.51,26.09 31.66,41.66 27.19,28.12 25.13,37.52 21.47,29.01 32.7,16.81 35.32,16.81 38.87,5.38 21.73,5.26 22.24,44.5 27.72,45.52 32.45,21.69 29.48,34.04 31.25,34.04 22.24,45.26 37.78,47.07 28.89,5.76 25.54,6.78 27.57,6.78 28.89,6.53 24.19,5.76 24.19,6.53 24.19,5 24.19,4.24 31.89,6.65 33.92,6.65 22.24,46.02 21.68,41.48 38.24,34.11
  pour $+3V3 (rank 4, no thermals): 19.7,54.41 40.02,54.41 40.02,6.15 39.51,3.61 20.97,3.61 19.7,6.15
  pour Top (rank 4, no thermals): 22.7,58.36 56.27,58.11 56.32,0 38.56,0.01 0.07,0.01 0.2,58.25
  pour Bottom (rank 4, no thermals): -0.15,58.26 35.02,58.26 56.22,58.25 56.26,0.06 0.07,0.06 0.1,7.85
  pour $GND (rank 4, no thermals): 19.7,54.41 40.02,54.41 40.02,6.15 39.51,3.61 20.97,3.61 19.7,6.15
ILIM
  Bottom 0.203: R2.1 29.35,44.63 29.6,44.88 U$1.10
  Bottom 0.254: U$1.10
LED1
  Top 0.203: 34.94,40.54 33.9,40.54 R10.1
  Top 0.305: 34.94,40.54 34.97,40.54
  Top 0.406: BLUE_LED_0603.A 34.94,40.54
N$1
  Top 0.61: 3.95,6.06 11.15,6.06 17.6,12.51 20.95,12.51 21,12.46 20.95,12.46
N$2
  Top 0.61: 3.9,8.61 11.35,8.61 17.75,15.01 20.9,15.01 20.95,15.06
N$3
  Top 0.61: 3.95,11.16 11.7,11.16 18.05,17.51 20.85,17.51 20.9,17.56
N$4
  cutout $GND: 31.41,50.78 arc-90 32.1,51.47 32.11,51.47 arc-91 32.79,50.78 arc-88 32.1,50.09 arc-92
N$6
  Top 0.305: RED_LED_0603.C 28.73,45.26 29.35,45.26 29.6,45.01 R4.2
N$7
  Bottom 0.203: U$1.8 30.61,45.22 30.97,44.86 31.66,44.86 32.02,44.5 R16.1
N$9
  Top 0.406: C45.1 8.68,25.75 U10.2
N$10
  cutout Top: 25.67,6.02 27.44,6.02 27.44,4.11 25.67,4.11
N$11
  Top 0.305: R23.1 31.01,43.38 C39.1 34.07,43.38 34.3,43.62 U4.2
N$12
  Top 0.305: U4.3 34.8,43.62 35.06,43.36 35.29,43.36 C38.1 36.02,43.33 R22.1
N$13
  Top 0.61: 3.8,13.66 5.95,12.91 11.05,12.91 18.2,19.96 20.8,19.96 20.9,20.06
N$14
  Top 0.61: 4.3,16.11 6.2,15.06 8.45,15.06
N$15
  Bottom 0.203: U3.31 27.47,35.99 C35.1
N$16
  Bottom 0.203: U3.47 36.71,31.27 36.71,32.82 36.08,33.45 C32.1
N$17
  cutout $GND: 35.31,50.78 arc-90 36,51.47 36.01,51.47 arc-91 36.69,50.78 arc-88 36,50.09 arc-92
N$18
  cutout $+3V3: 31.41,50.78 arc-90 32.1,51.47 32.11,51.47 arc-91 32.79,50.78 arc-88 32.1,50.09 arc-92
N$19
  cutout $+3V3: 35.31,50.78 arc-90 36,51.47 36.01,51.47 arc-91 36.69,50.78 arc-88 36,50.09 arc-92
N$20
  cutout Bottom: 31.41,50.78 arc-90 32.1,51.47 32.11,51.47 arc-91 32.79,50.78 arc-88 32.1,50.09 arc-92
N$21
  cutout Bottom: 35.31,50.78 arc-90 36,51.47 36.01,51.47 arc-91 36.69,50.78 arc-88 36,50.09 arc-92
N$22
  cutout $+3V3: 30.66,52.31 30.66,53.47 arc-90 31.32,54 31.33,54 arc-90 31.89,53.44 31.89,52.35 arc-90 31.35,51.76 arc-90
  cutout $+3V3: 36.21,52.31 36.21,53.44 arc-90 36.76,54 36.78,54 arc-90 37.44,53.42 37.44,52.35 arc-90 36.7,51.76 arc-90
N$23
  Top 0.61: 9.25,28.31 9.25,29.91 10,30.01
N$24  (via drill 0.6)
  other vias: 14.75,19.11
N$25
  Top 0.406: 13.6,20.46 13.6,19.86 14.3,19.16 14.7,19.11
N$26
  Top 0.61: 41.9,50.91 43.35,48.76
N$27
  Top 0.203: LED2.BLUE 29.7,38.84 R11.1
N$29
  Top 0.203: R9.1 29.7,36.09 30.45,36.84 LED2.GREEN
N$46
  Top 0.61: R33.2 8.85,32.98 Q1.G
  Top 0.813: R20.1 11.45,33.38 R33.2
N$54
  Top 0.203: LED2.RED 28.93,36.84 27.93,35.84 R12.1
OSC32_IN_UC
  Bottom 0.203: Y1.X1 29.84,19.84 30.09,20.09 C34.1 30.09,21.03 29.86,21.26 27.82,21.26 27.29,21.79 27.29,22.55 U3.3
OSC32_OUT_UC
  Bottom 0.203: Y1.X2 27.34,19.84 27.09,20.09 C33.1 27.19,20.73 27.19,21.39 26.94,21.64 26.94,22.9 U3.4
OSC_IN_UC
  Bottom 0.203: Y2.1 25.41,19.73 25.77,20.09 C28.1 25.87,20.73 25.87,21.72 26.55,22.4 26.55,23.23 U3.5
OSC_OUT_UC
  Bottom 0.203: Y2.3 23.12,16.56 24.01,17.45 24.01,19.73 23.76,19.99 23,19.99 22.77,20.22 C26.1 22.77,21.03 23.25,21.51 24.4,21.51 25.03,22.15 25.79,22.15 26.17,22.53 26.17,23.55 U3.6
P_3V3  (via drill 0.3)
  Top 0.254: v30.87,39.62 30.57,39.62 30.14,40.05 30.14,41.55 30.26,41.68 30.8,41.68 U9.1
  $+3V3 0.406: v34.43,39.42 31.08,39.42 v30.87,39.62
  Bottom 0.203: U2.3 36.21,39.22 C19.1 | U2.3 U2.4 35.03,38.82 U2.5 | C18.1 32.52,39.22 U8.3 31.17,39.22 30.87,39.52 v30.87,39.62 | U2.3 34.63,39.22 v34.43,39.42
PA8_PM_SCL  (via drill 0.3)
  Top 0.203: U4.7 34.3,47.55 34.12,47.73 33.46,47.73 33.29,47.55 33.29,47.07 32.75,46.53 v32.73,46.53
  $+3V3 0.203: v32.73,46.53 33.79,45.47 33.79,43.31 34.07,43.03 34.73,43.03 35.22,42.54 35.22,41.07 35.37,40.92 35.37,36.91 v34.94,36.47
  Bottom 0.203: U3.41 34.68,33.48 34.68,35.64 34.94,35.89 v34.94,36.47 | v32.73,46.53 33.79,46.53 arc90 U$9.P$1 34.05,46.79 34.28,47.02 R14.1
  Bottom 0.254: v32.73,46.53 32.65,46.53 32.38,46.8 U$1.5
PC9_PM_SDA  (via drill 0.3)
  Top 0.203: U4.8 33.77,47.04 33.31,46.58 33.31,46.28 32.8,45.77 v32.45,45.77
  $+3V3 0.203: v32.45,45.77 32.9,45.77 33.39,45.29 33.39,42.93 33.21,42.75 33.21,42.34 32.95,42.09 32.95,41.53 33.39,41.1 34.66,41.1 35.01,40.74 35.01,37.34 34.28,36.6 34.28,36.04 34.68,35.64 34.68,33.45 32.78,31.55 v31.94,31.55
  Bottom 0.203: U3.40 32.04,31.55 v31.94,31.55 | v32.45,45.77 33.29,45.77 R13.1 | R13.1 33.87,45.24 | R13.1 33.87,45.19 U$8.P$1
  Bottom 0.254: U$1.6 31.83,45.95 32.02,45.77 v32.45,45.77
PMID
  Bottom 0.254: U$1.23 30.61,50.48 29.98,51.1 C5.1
  pour Bottom (no thermals): 30.87,49.07 30.36,49.07 30.39,50.11 29.5,50.11 29.48,52.12 31.13,52.12 31.38,51.87 31.38,50.47 30.87,49.96
PWR_UB  (via drill 0.3)
  Top 0.203: U1.15 36.51,25.58 35.32,25.58 34.94,25.2 32.27,25.2 32.02,25.45 31.25,25.45 30.75,25.96 30.24,25.96 29.35,25.07 v29.35,24.43
  $GND 0.203: v28.89,41 28.97,40.92 28.97,38.71 29.25,38.43 29.25,36.55 28.84,36.14 28.84,33.83 29.22,33.45 29.22,24.56 v29.35,24.43
  Bottom 0.203: U5.4 24.9,40.41 24.9,41.38 25.08,41.55 26.2,41.55 26.45,41.3 R1.1 arc90 26.53,41 v28.89,41
PWR_UC
  Bottom 0.203: U3.28 26.4,34.94 26.4,35.59 26.17,35.81 26.17,36.52 25.79,36.91 U5.2 25.79,38.79 25.59,38.99 22.74,38.99 22.41,39.32 22.41,41.86 22.72,42.16 R29.1
QGND  (via drill 0.6)
  Top 0.5: U10.3 7.45,23.31 7.45,29.96 7.9,30.11 | U7.GND U7.7
  Top 0.813: C42.2 C43.2 C44.2 13.09,26.66 v11.5,26.66 | v16.75,21.96 16.75,22.05 U7.7
  Top 1.016: Q1.D 4.55,35.17 4.55,30.51 | 4.55,30.51 4.94,30.11 7.9,30.11 C42.2 | 4.55,30.51 4.55,19.01 4.05,18.66 1.5,18.66 arc-90 1.4,18.76 1.4,2.06 arc90 2.35,1.11 5.6,1.11 arc90 5.75,1.26 6.2,1.71 55.1,1.71 55.1,25.74 SV2.3 52.41,25.56 55.1,25.56 | JP6.1 55.1,51.72 55.1,41.16 52.13,41.16 JP7.1 55.1,41.08 55.1,25.56 | 55.1,25.56 55.1,12.66 SV1.4
  Bottom 0.813: v11.5,26.66 11.5,21.96 v16.75,21.96
REGN  (via drill 0.3)
  $+3V3 0.254: v28.21,50.85 27.95,50.47 27.95,46.28 29.02,45.21 29.02,42.09 v28.79,41.86
  Bottom 0.203: R18.1 27.57,43.18 27.85,42.9 28.23,42.9 28.56,42.57 28.56,42.09 v28.79,41.86
  Bottom 0.254: C25.1 28.21,51.37 v28.21,50.85 28.46,50.6 29.58,50.6 30.11,50.07 U$1.22 | 27.57,43.31 R18.1
RESET_UB  (via drill 0.3)
  Top 0.203: 36.73,28.5 U1.18 arc-90 36.67,28.45 33.06,28.45 32.65,28.04 32.65,27.48 31.89,26.72 30.49,26.72 28.59,24.81 v28.59,24.31
  $GND 0.203: v28.59,24.31 28.59,24.43 28.84,24.69 28.84,33.32 28.46,33.7 28.46,36.45 28.84,36.83 28.84,38.23 28.38,38.68 v28.38,40.33
  Bottom 0.203: U6.4 22.86,39.56 23.07,39.34 26.66,39.34 27.11,39.8 27.32,39.8 27.85,40.33 v28.38,40.33
RESET_UC
  Bottom 0.203: U3.24 25.16,33.35 25.16,35.64 23.91,36.88 R30.1 23.51,37.39 U6.2
RGB_BLUE  (via drill 0.3)
  Top 0.203: R11.2 27.98,38.79 26.43,38.79 25.82,38.18 25.82,36.4 v25.54,36.12
  $+3V3 0.203: v25.67,29.77 25.79,29.77 26.3,30.28 26.3,33.93 25.23,35 25.23,35.81 v25.54,36.12
  Bottom 0.152: U3.17 22.49,29.77 U$13.P$1
  Bottom 0.203: U3.17 23.79,29.77 v25.67,29.77
RGB_GREEN  (via drill 0.3)
  Top 0.203: R9.2 28.74,35.13 28.21,34.59 25.18,34.59 24.9,34.87 24.9,36.63 v25.03,36.75
  $+3V3 0.203: v26.43,28.12 26.43,29.13 27.06,29.77 27.06,35.48 25.79,36.75 v25.03,36.75
  Bottom 0.152: U3.16 22.49,26.94 22.49,26.54 U$12.P$1
  Bottom 0.203: U3.16 24.3,28.75 25.92,28.75 26.43,28.24 v26.43,28.12
RGB_RED  (via drill 0.3)
  Top 0.203: R12.2 26.88,35.3 v25.82,35.3
  $+3V3 0.203: v25.67,28.12 25.67,28.88 26.68,29.9 26.68,34.59 25.97,35.3 v25.82,35.3
  Bottom 0.152: U3.15 23.07,26.82 23.07,25.3 22.92,25.3 U$11.P$1
  Bottom 0.203: U3.15 24.37,28.12 v25.67,28.12
RI_UB  (via drill 0.3)
  Top 0.203: v30.49,25.32 30.36,25.2 30.36,24.43 31.25,23.55 32.4,23.55 33.29,22.66 33.29,21.51 33.67,21.13 33.67,17.45 34.94,16.18 36.51,16.18 U1.7
  $GND 0.203: v30.49,25.32 30.31,25.5 30.31,27.81 30.87,28.37 30.87,32.18 32.27,33.58 32.27,36.47 33.16,37.36 33.16,38.79 30.57,41.38 v30.57,42.65
  Bottom 0.203: U8.14 30.67,42.54 v30.57,42.65 30.75,42.65 31.13,43.03 R28.1
RI_UC
  Bottom 0.203: 31.27,35.92 U3.33 31.27,36.28 30.67,36.88 30.67,37.87 U8.7
RTS_UB  (via drill 0.3)
  Top 0.203: v34.3,20.24 34.68,19.86 36.72,19.86 U1.10
  $GND 0.203: v34.3,20.24 34.3,20.5 34.94,21.13 34.94,24.18 34.55,24.56 34.55,25.32 35.95,26.72 35.95,40.33 v34.63,41.66
  Bottom 0.203: U2.15 v34.63,41.65 v34.63,41.66
RTS_UC
  Bottom 0.203: 32.06,35.02 U3.35 31.98,35.06 32.7,35.79 32.7,36.32 33.46,37.08 34.23,37.08 34.63,37.49 | 35.67,37.36 R24.1 arc90 35.75,37.49 34.63,37.49 | U2.6 34.63,37.49
RX  (via drill 0.3, 0.6)
  Top 0.406: SV2.2 46.7,23.2 45.65,24.26 45.65,41.21 46,41.56 46,43.01 v44.85,44.16
  $+3V3 0.203: JP1.4 22.24,41.71 22.24,39.67 22.62,39.29 22.62,37.26 23.38,36.5 23.38,35.23 24.4,34.21 24.4,31.29 25.16,30.53 v25.67,30.53
  Bottom 0.203: U3.43 34.04,31.42 33.39,31.42 32.6,30.63 31.69,30.63 31.38,30.33 31.38,29.49 30.24,28.35 28.36,28.35 26.17,30.53 v25.67,30.53
  Bottom 0.406: v44.85,44.16 42.9,46.11 42.9,54.36 40.95,56.31 18.7,56.31 16.8,54.41 16.8,44.06 17.88,42.98 JP1.4
RXD_UB  (via drill 0.3)
  Top 0.203: U1.13 36.64,22.91 34.05,22.91 32.14,24.81 v31.76,24.81
  $GND 0.203: v31.76,24.81 31.76,24.56 31.25,24.05 30.75,24.05 29.93,24.87 29.93,28.02 30.49,28.57 30.49,32.31 31.89,33.7 31.89,36.22 30.97,37.13 30.97,38.76 31.53,39.32 31.53,39.88 29.6,41.81 v29.6,41.86
  Bottom 0.203: U8.13 30.27,40.96 29.6,41.63 v29.6,41.86 29.6,41.94 29.22,42.32 29.22,42.47 28.66,43.03 28.66,43.18 R21.1
RXD_UC
  Bottom 0.203: U3.30 28.28,34.47 28.59,34.47 29.63,35.51 29.63,36.19 30.27,36.84 U8.8
SCL  (via drill 0.6)
  Top 0.406: R34.2 9.93,16.81 U10.8 9.95,20.83 9.95,18.16 | U7.SCK 12.3,23.55 12.3,19.91 13.55,18.81 v13.6,18.16 | 9.95,16.86 9.95,18.16 | 9.95,18.16 v10.9,18.16 | SV1.2 44.8,7.57 44.8,22.66 42.26,25.2 JP2.8
  Bottom 0.406: v13.6,18.16 13.6,4.21 16.15,2.06 41.7,2.11 44.85,4.86 44.8,22.86 42.46,25.2 JP2.8 | v10.9,18.16 v13.6,18.16 | 13.7,18.16 v13.6,18.16
SDA  (via drill 0.6)
  Top 0.406: R32.2 8.39,17.49 8.7,17.86 U10.7 8.7,20.83 v8.7,19.06 | SV1.1 43.65,5.03 43.65,21.21 42.2,22.66 JP2.7
  Bottom 0.406: v8.7,19.06 9.05,19.41 14,19.41 14.3,19.11 14.7,19.11 14.9,18.91 14.9,4.96 17.05,2.81 40.95,2.81 43.65,5.51 43.65,21.21 42.2,22.66 JP2.7
SIM_CLK  (via drill 0.3)
  Top 0.203: U1.38 24.86,26.38 27.44,23.8 27.44,18.46 31.13,14.78 31.13,14.15 30.62,13.64 v29.73,13.64
  Top 0.406: v35.32,4.62 34.94,5 C12.1
  Bottom 0.305: v29.73,13.64 29.73,11.35 33.03,8.05 33.03,5.38 33.54,4.88 33.89,4.88 J1.C3 34.14,4.62
  Bottom 0.406: J1.C3 35.28,4.59 v35.32,4.62
SIM_IO  (via drill 0.3)
  Top 0.203: U1.39 25.46,25.28 27.06,23.67 27.06,18.34 30.36,15.04 v30.36,14.65
  Bottom 0.254: 34.15,16.71 35.24,17.8 C13.1
  Bottom 0.305: v30.36,14.65 30.36,13.89 30.87,13.38 32.4,13.38 32.9,13.89 32.9,15.8 33.29,16.18 34.16,16.18 J1.C7 | 34.15,16.21 34.15,16.71
  Bottom 0.406: 34.15,16.21 J1.C7
SIM_RST  (via drill 0.3)
  Top 0.203: U1.40 23.38,24.18 24.01,24.81 25.41,24.81 26.68,23.55 26.68,18.21 28.46,16.43 v28.46,13.64
  Top 0.406: v32.78,4.62 32.9,4.75 C10.1
  Bottom 0.305: v28.46,13.64 28.46,10.08 30.36,8.18 30.36,5.51 31,4.88 31.35,4.88 J1.C2 31.6,4.62
  Bottom 0.406: J1.C2 32.74,4.59 v32.78,4.62
SIM_VCC  (via drill 0.3)
  Top 0.406: C11.1 30.36,5.66 | 30.36,5.66 C14.1 | U1.41 23.07,22.91 25.03,22.91 26.05,21.89 26.05,14.15 26.55,13.64 v27.19,13.64 | v30.24,4.62 30.36,4.75 30.36,5.66
  Bottom 0.406: v30.24,4.62 30.2,4.59 J1.C1 29.06,4.62 28.97,4.62 28.23,5.36 28.23,7.9 27.19,8.94 v27.19,13.64 27.95,14.4 27.95,16.81 28.41,17.27 30.34,17.27 31.42,16.19 J1.C6
SOIL_MOIST  (via drill 0.6)
  Top 0.406: v46.1,3.36 45.5,2.76 17.75,2.76 16.75,3.76 v16.75,8.66
  Bottom 0.406: JP7.2 54.7,38.54 54.7,33.16 46.1,33.16 v46.1,3.36 | v16.75,8.66 17.85,9.76 17.85,23.91 19.14,25.2 JP1.11
SOIL_MOIST_POWER
  Bottom 0.61: JP7.3 42.65,36 41.9,35.36 JP2.12
SOIL_TEMP
  Top 0.406: JP6.2 47.15,49.21 45.65,46.96 43.4,46.93 | 43.4,46.93 43.4,32.91 38.75,32.91 JP2.11 | 43.4,46.93 43.6,47.06
STAT  (via drill 0.3)
  Top 0.305: R4.1 29.6,42.87 v29.78,42.7
  $+3V3 0.254: v32.73,47.29 32.65,47.29 31.76,46.41 31.76,44.68 v29.78,42.7
  Bottom 0.254: U$1.4 v32.72,47.3 v32.73,47.29
SW1
  pour Bottom (rank 2, no thermals): 29.12,49.17 27.14,49.17 26.76,49.3 26.76,50.77 26.6,51.18 25.82,51.84 22.82,51.84 22.62,52.04 22.62,53.52 22.82,53.72 26.88,53.72 27.7,52.91 27.7,50.29 28.1,49.88 29.12,49.88
SW2
  pour Top (rank 3, no thermals): 22.74,44.25 23,44.25 23,43.61 23.63,42.98 24.14,42.98 24.4,42.72 24.4,40.05 24.14,39.8 23.12,39.8 22.74,40.18
TS
  Bottom 0.203: 27.57,44.32 R18.2 | U$1.12 U$1.11 | R19.1 R18.2 | 28.61,45.38 U$1.12 | R18.2 27.57,44.86 27.67,44.96 28.26,44.96 28.61,45.31 U$1.12
TX  (via drill 0.3, 0.6)
  Top 0.406: SV2.1 45.5,20.66 45.5,23.16 44.8,23.86 v44.8,42.01
  $+3V3 0.203: v25.67,31.29 25.41,31.29 24.78,31.93 24.78,34.34 23.76,35.36 23.76,36.63 23,37.39 23,39.42 22.62,39.8 22.62,41.83 22.24,42.21 22.24,43.48 20.97,44.75 JP1.3
  Bottom 0.203: U3.42 33.81,31.9 33.18,31.9 32.27,30.99 31.48,30.99 31.02,30.53 31.02,29.64 30.09,28.7 28.51,28.7 25.92,31.29 v25.67,31.29
  Bottom 0.406: v44.8,42.01 41.95,44.86 41.95,54.06 40.65,55.36 18.9,55.36 17.7,54.16 17.7,46.11 18.29,45.52 JP1.3
TXD_UB  (via drill 0.3)
  Top 0.203: U1.12 34.59,21.98 v34.35,21.74
  $GND 0.203: v34.55,42.42 34.07,41.94 34.07,41.35 35.57,39.85 35.57,26.85 34.17,25.45 34.17,24.43 34.55,24.05 34.55,21.95 v34.35,21.74
  Bottom 0.203: U2.14 34.23,41.25 34.07,41.4 34.07,41.94 v34.55,42.42
TXD_UC  (via drill 0.3)
  $+3V3 0.203: v31.58,37.39 30.41,36.22 v30.41,35.89
  Bottom 0.203: U2.7 34.23,37.82 34.23,37.59 34.07,37.44 33.31,37.44 32.67,36.8 32.02,36.8 31.58,37.24 v31.58,37.39 31.58,37.34 | v30.41,35.89 30.41,35.79 28.71,34.09 27.96,34.09 U3.29 27.37,34.66
  Bottom 0.305: 27.37,34.66 26.81,35.23 R25.1
USB_DM
  Top 0.406: X1.D- 34.7,48.8 U$7.P$2
  Bottom 0.203: U$1.3 32.44,47.8 32.5,47.85 33.03,47.85 33.26,47.62 34,47.62 U$7.P$2 35.44,48.56 36.84,47.17 36.84,45.62 R6.2
USB_DM_UC
  Bottom 0.203: U3.44 35.7,32.37 35.7,32.56 35.06,33.2 35.06,35.48 35.32,35.74 36.46,35.74 36.84,36.12 36.84,42.49 36.31,43.03 35.98,43.03 35.7,43.31 R6.1
USB_DP
  Top 0.406: X1.D+ 34.05,48.95 U$7.P$1
  Bottom 0.203: U$1.2 33.4,48.3 U$7.P$1 34.55,49.45 35.32,49.45 37.22,47.55 37.22,45.06 R5.2
USB_DP_UC
  Bottom 0.203: U3.45 36.21,32.17 36.21,32.69 35.44,33.45 35.44,35.23 35.57,35.36 36.71,35.36 37.22,35.86 37.22,42.93 R5.1
V_BCKP  (via drill 0.3)
  Top 0.203: U1.2 36.33,10.98 35.83,11.48 32.27,11.48 31.89,11.86 31.89,14.53 v31.86,14.55
  $GND 0.203: v27.98,41.58 27.8,41.4 27.8,38.63 27.44,38.28 27.44,36.88 28.08,36.25 28.08,33.58 28.46,33.2 28.46,25.07 27.95,24.56 27.95,18.46 v31.86,14.55
  Bottom 0.203: R1.2 27.52,42.04 v27.98,41.58
V_INT  (via drill 0.3)
  Top 0.203: U1.4 36.73,13.26 34.43,13.26 33.29,14.4 33.29,20.62 v33.11,20.8
  $GND 0.203: v33.79,42.52 34.25,42.98 34.81,42.98 35.14,42.65 35.14,42.24 35.72,41.66 v35.77,41.66 35.77,41.35 36.33,40.79 36.33,26.59 34.94,25.2 34.94,24.69 35.32,24.31 35.32,20.37 34.55,19.61 33.67,19.61 33.11,20.17 v33.11,20.8
  Bottom 0.152: U8.2 32.19,39.62 C21.1
  Bottom 0.178: C21.1 32.47,39.95
  Bottom 0.203: C22.1 36.1,39.95 | 36.1,39.95 35.77,39.62 U2.2 | 36.1,39.95 35.57,40.49 35.57,41.45 v35.77,41.66 | C21.1 32.55,39.95 33.16,40.56 33.16,41.35 32.95,41.55 32.95,42.09 33.39,42.52 v33.79,42.52 | R3.2 35.16,20.8 v33.11,20.8
VBAT  (via drill 0.3)
  $GND 0.203: JP2.16 37.48,44.25 37.48,24.94 36.46,23.93 36.46,18.46 35.42,17.42 34.78,17.42 33.13,15.77 31.2,15.77 29.8,17.17 29.8,20.93 v28.87,21.87
  $GND 0.254: v28.87,21.87 30.39,21.87 32.5,19.76 32.5,19.3 v32.57,19.23
  Bottom 0.203: U3.1 28.73,22 28.74,22 v28.87,21.87
  Bottom 0.305: J3.2 v32.57,19.23
VBUS  (via drill 0.3)
  Top 0.61: v36.71,49.58 36.87,49.73
  other vias: 36.08,49.58
  pour Top (rank 2, no thermals): 35.32,49.45 35.32,51.74 36.84,51.74 36.84,53.9 39.64,53.9 39.64,51.36 37.86,51.36 37.86,49.2 35.57,49.2
  pour Bottom (rank 2, no thermals): 34.17,50.47 36.97,50.47 37.22,50.22 37.22,49.45 36.97,49.2 36.08,49.2 35.44,49.83 34.17,49.83
VIN  (via drill 0.3, 1.1)
  Top 1.27: 20.85,50.66 15,50.66 | 15,50.66 14.15,51.51 | JP1.1 15.01,50.6 v14.05,51.56 14.95,50.66 15,50.66
  $+3V3 1.016: JP1.1 22.74,52.37 28.87,52.37 28.87,52.35 29.6,51.61 29.6,50.34 30.36,49.58 31.79,49.58 v31.99,49.35
  Bottom 1.27: 7.85,51.56 7.9,51.51 14.15,51.51 14,51.56 v14.05,51.56
  other vias: 31.71,49.71
  pour Bottom (rank 3, no thermals): 31,49.07 31,49.83 31.38,50.22 31.63,50.47 31.63,51.36 32.14,51.36 32.27,51.36 32.27,51.99 33.03,51.99 35.44,51.99 35.83,51.99 35.83,49.83 34.05,49.83 33.79,49.83 32.65,48.69 31.38,48.69 31.38,49.07
WKP  (via drill 0.3)
  $+3V3 0.203: JP1.5 22.24,39.17 22.24,37.13 23,36.37 23,35.1 24.01,34.09 24.01,31.16 25.03,30.15 25.03,27.81 25.49,27.35 v26.05,27.35
  Bottom 0.203: v26.05,27.35 25.84,27.56 24.52,27.56 U3.14
(copper drawn outside any net)
  shapes: Bottom area x1

## Text on the board
tPlace: LI+ | VUSB | VIN | 3V3 | D+ | D- | GND | RST | + | TX | VBAT | RX | GND | D7 | WKP | DAC | D6 | MODE | RESET | A5 | D5 | A4 | D4 | A3 | D3 | A2 | D2 | A1 | D1 | A0 | D0 | B5 | C5 | B4 | C4 | B3 | C3 | B2 | C2 | B1 | C1 | B0 | C0
bPlace: PMID | SCL | SDA | MODE | v020
bDocu: PMID | BLUE | GREEN | RED | VBAT-3V3 / JUMPER | MODE BTN TEST POINT
_tsilk: - + | Date:2017-07-01